# Altium PCB SQUIDCtr_Rev2.PcbDoc (part 1 of 4)
Units mil, origin at the board's own origin, x right, y up, seen from the top; angles counter-clockwise.
Board outline 5863.43 x 2940 mil, 6 copper layers (Top Layer, Internal Plane 1, Mid-Layer 1, InternalPlane 2, Mid-Layer 2, Bottom Layer), stack 62.5 mil thick; 614 components, 343 nets, 1599 pads, 475 vias.
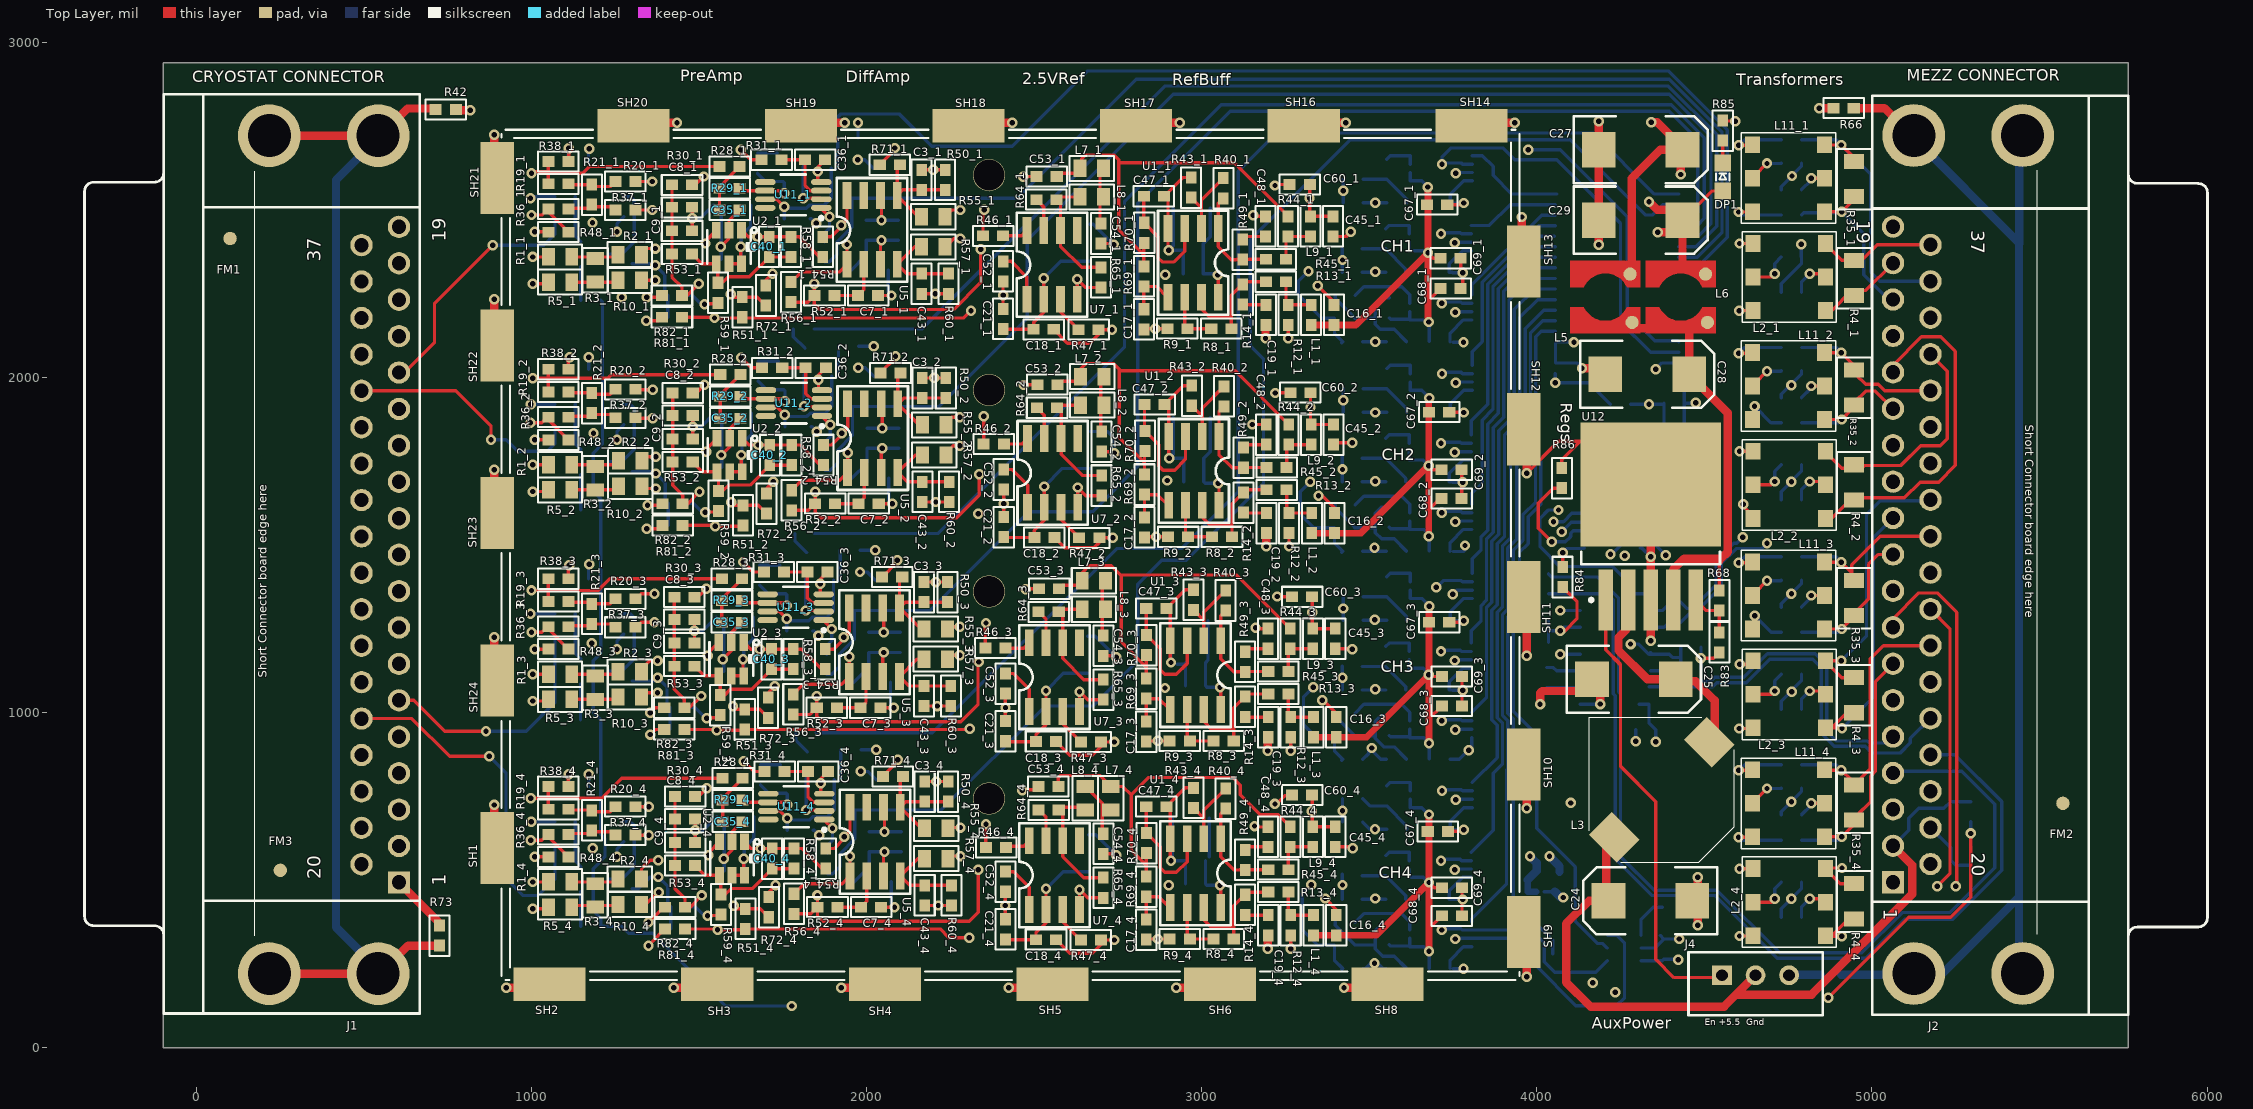
[diagram p0: Top Layer view]
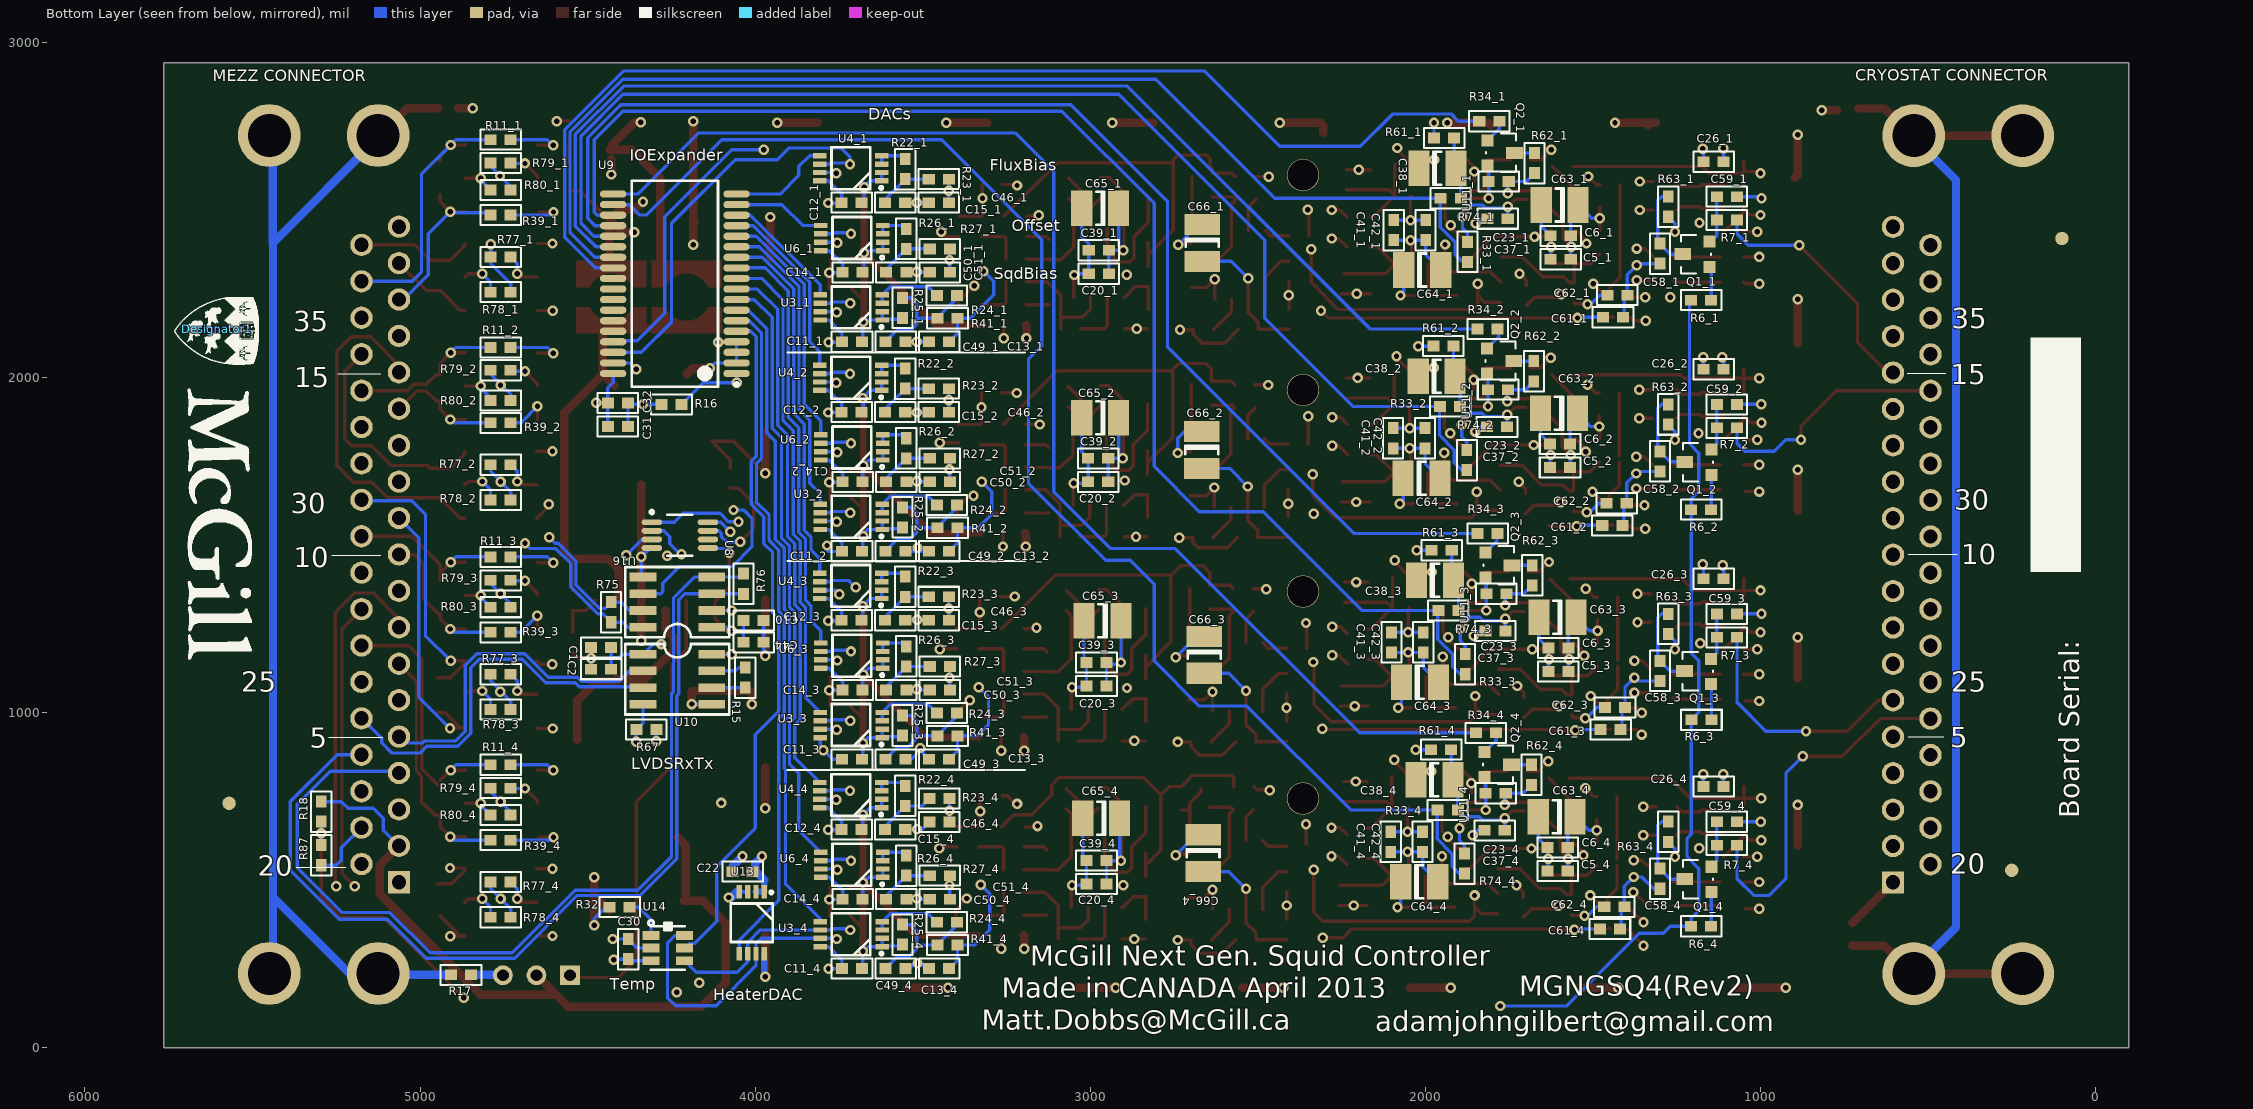
[diagram p1: Bottom Layer view, seen from below]
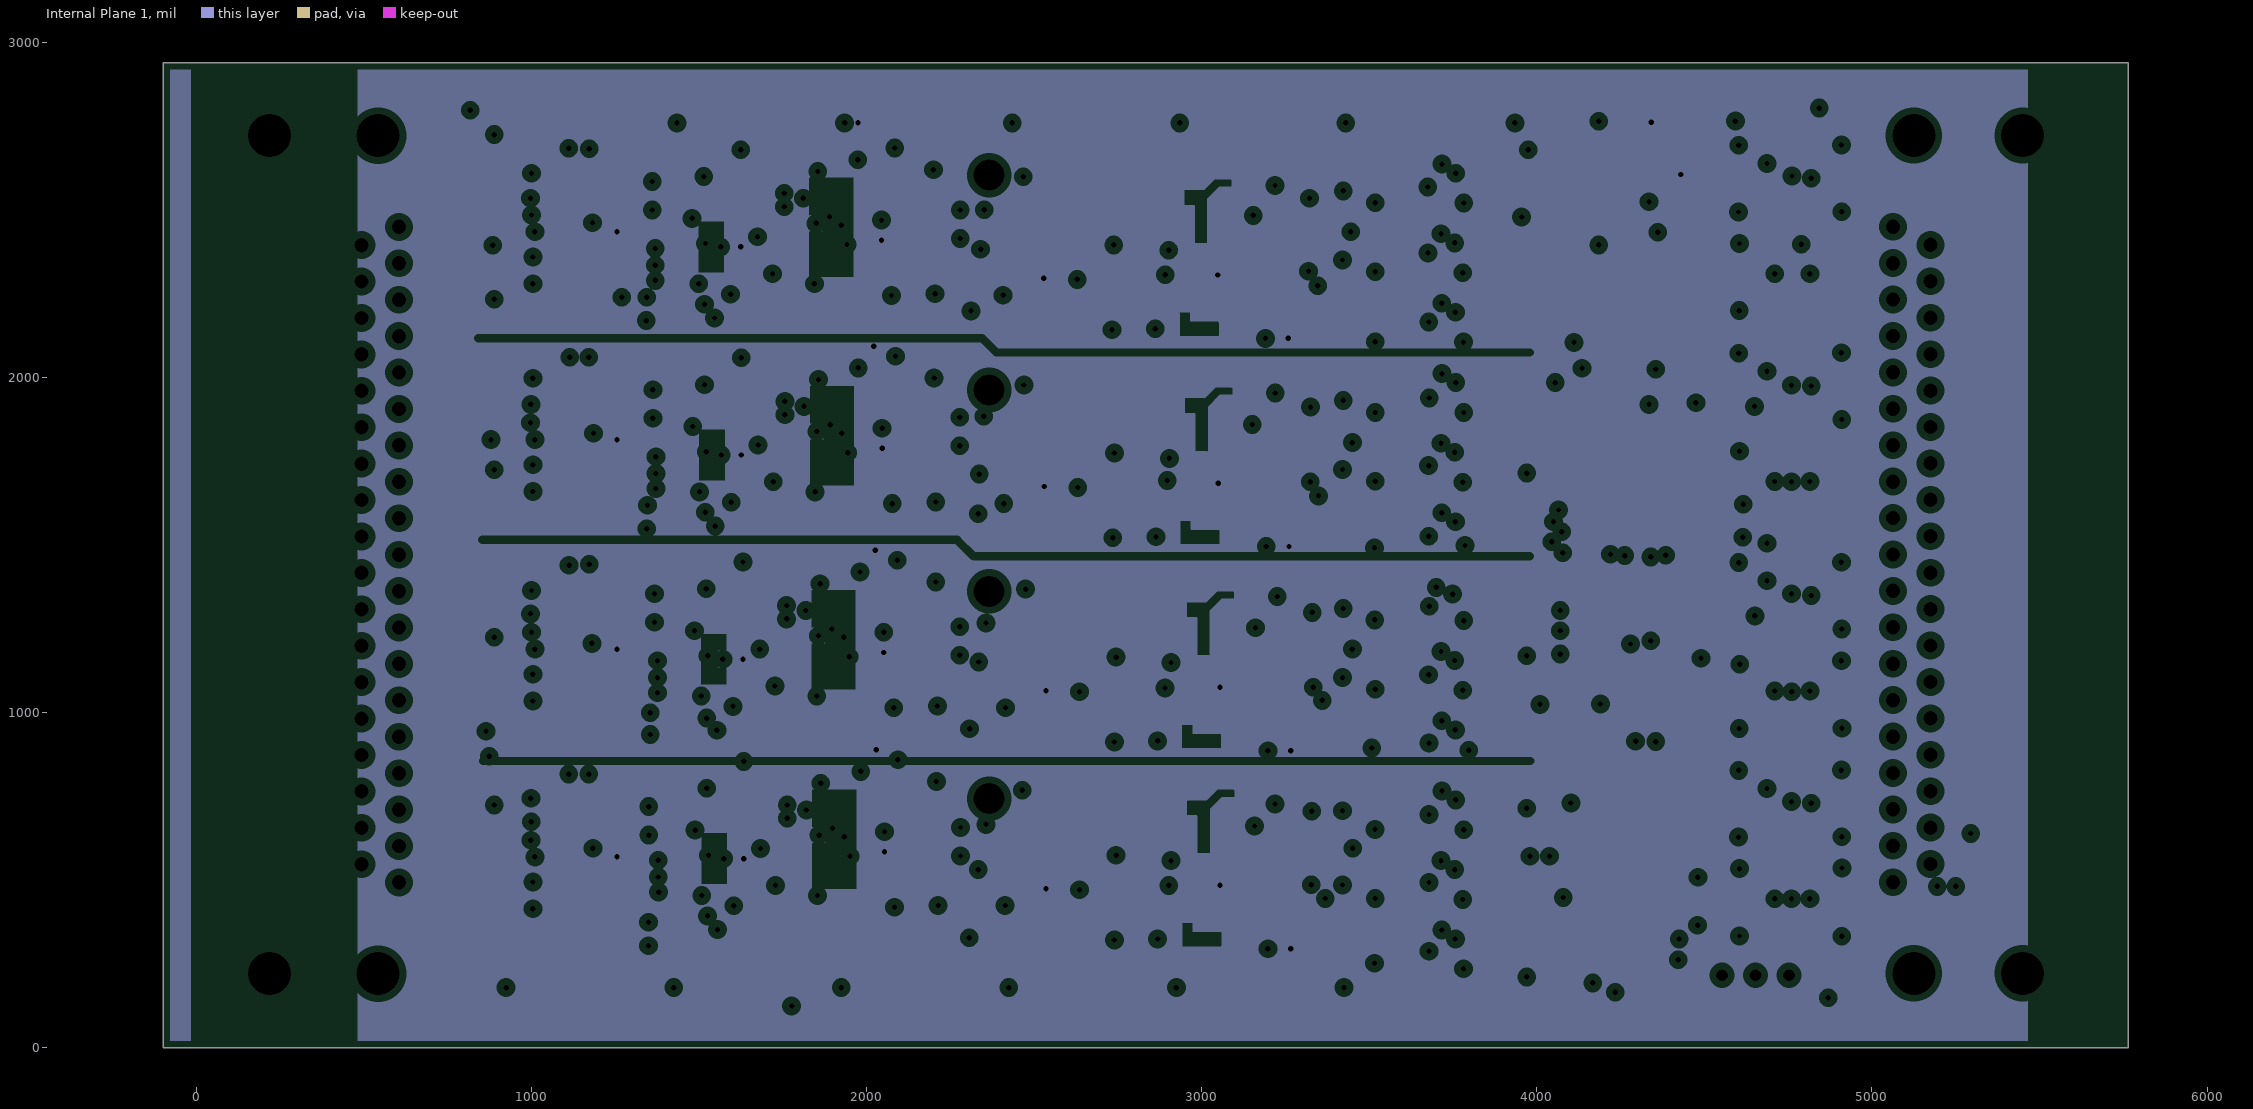
[diagram p2: Internal Plane 1, clearances drawn from the general rule]
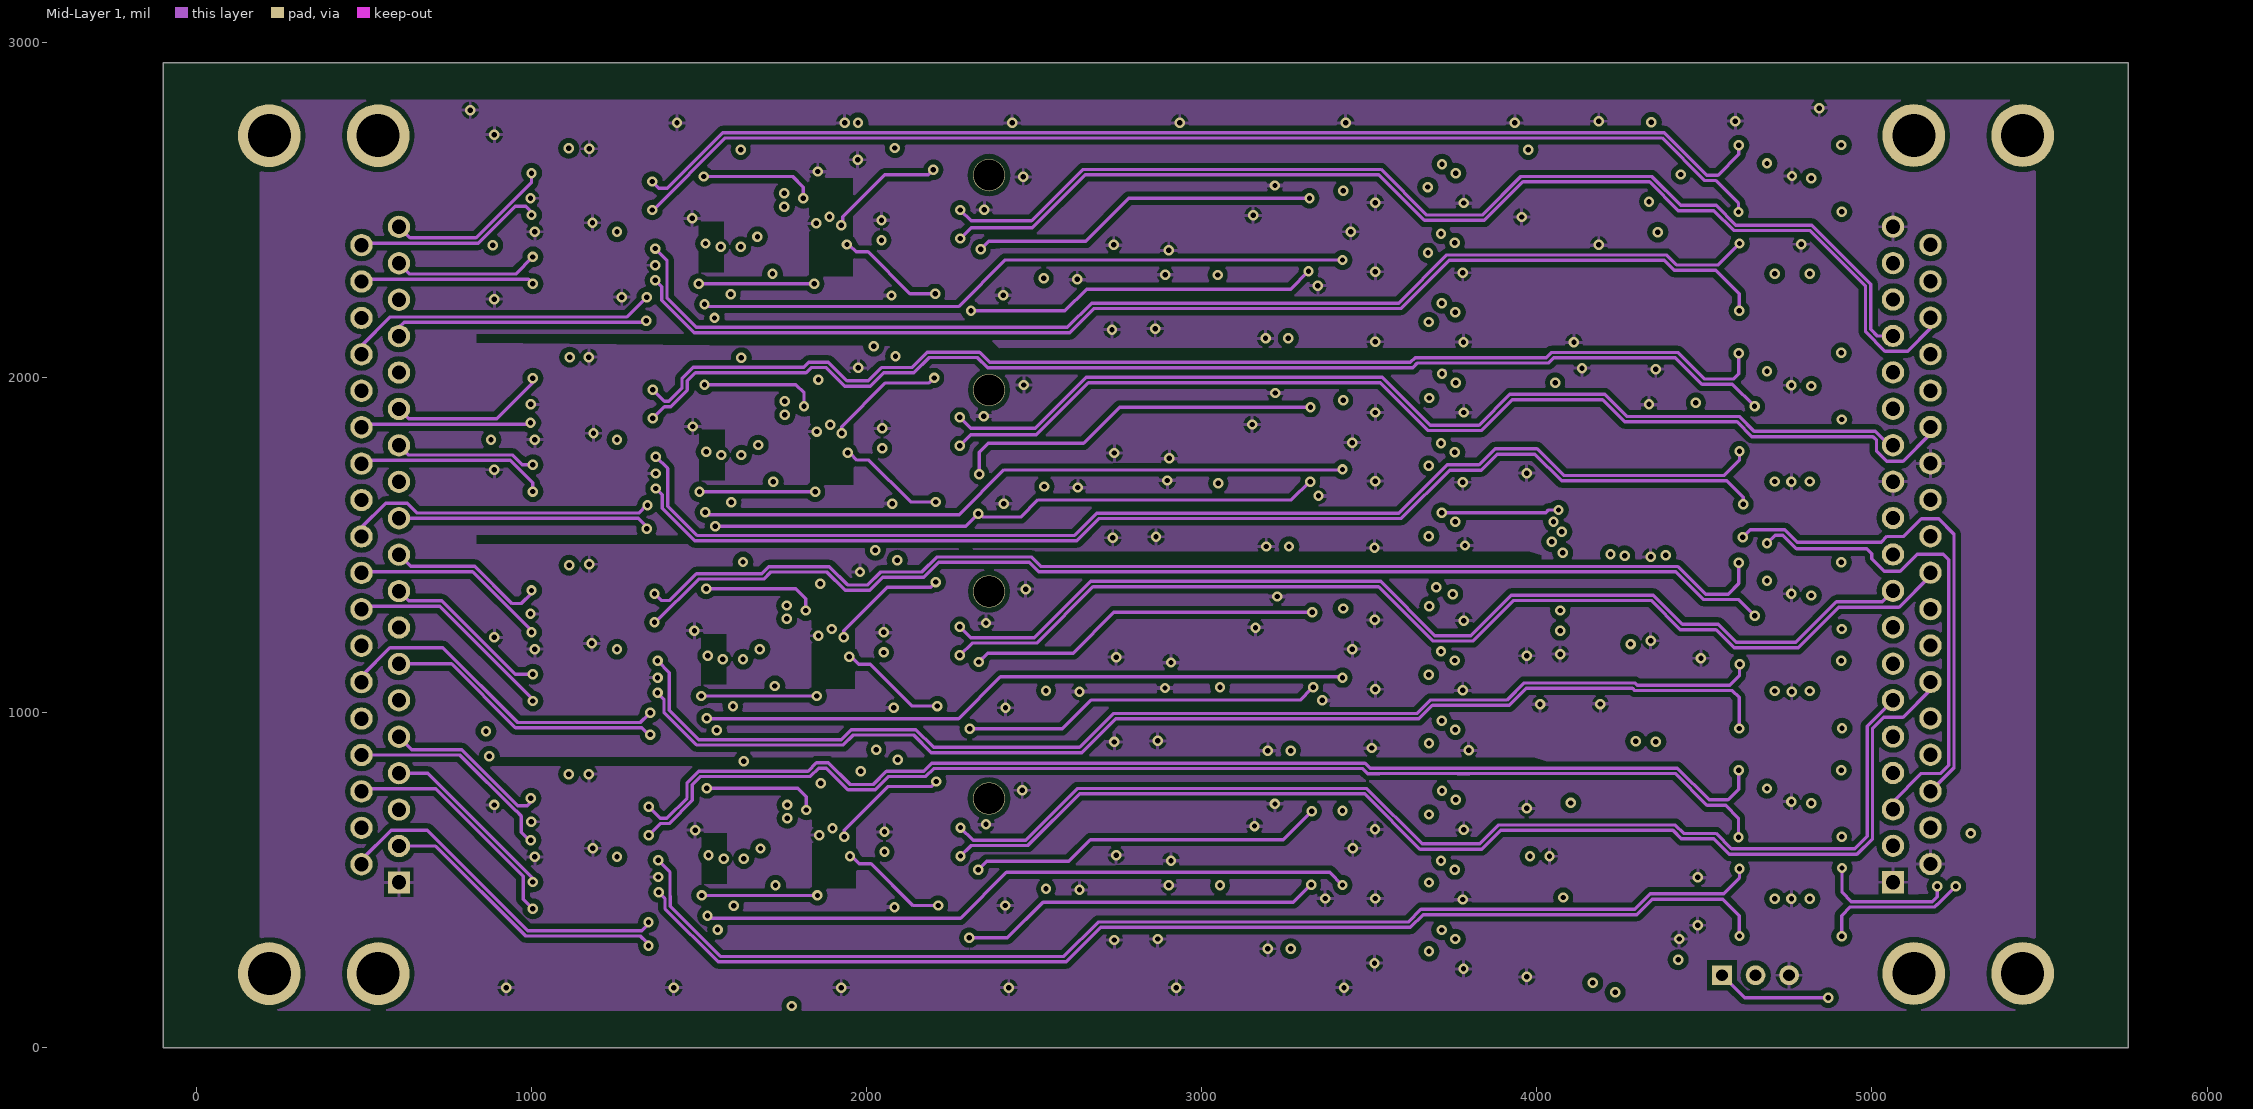
[diagram p3: Mid-Layer 1]
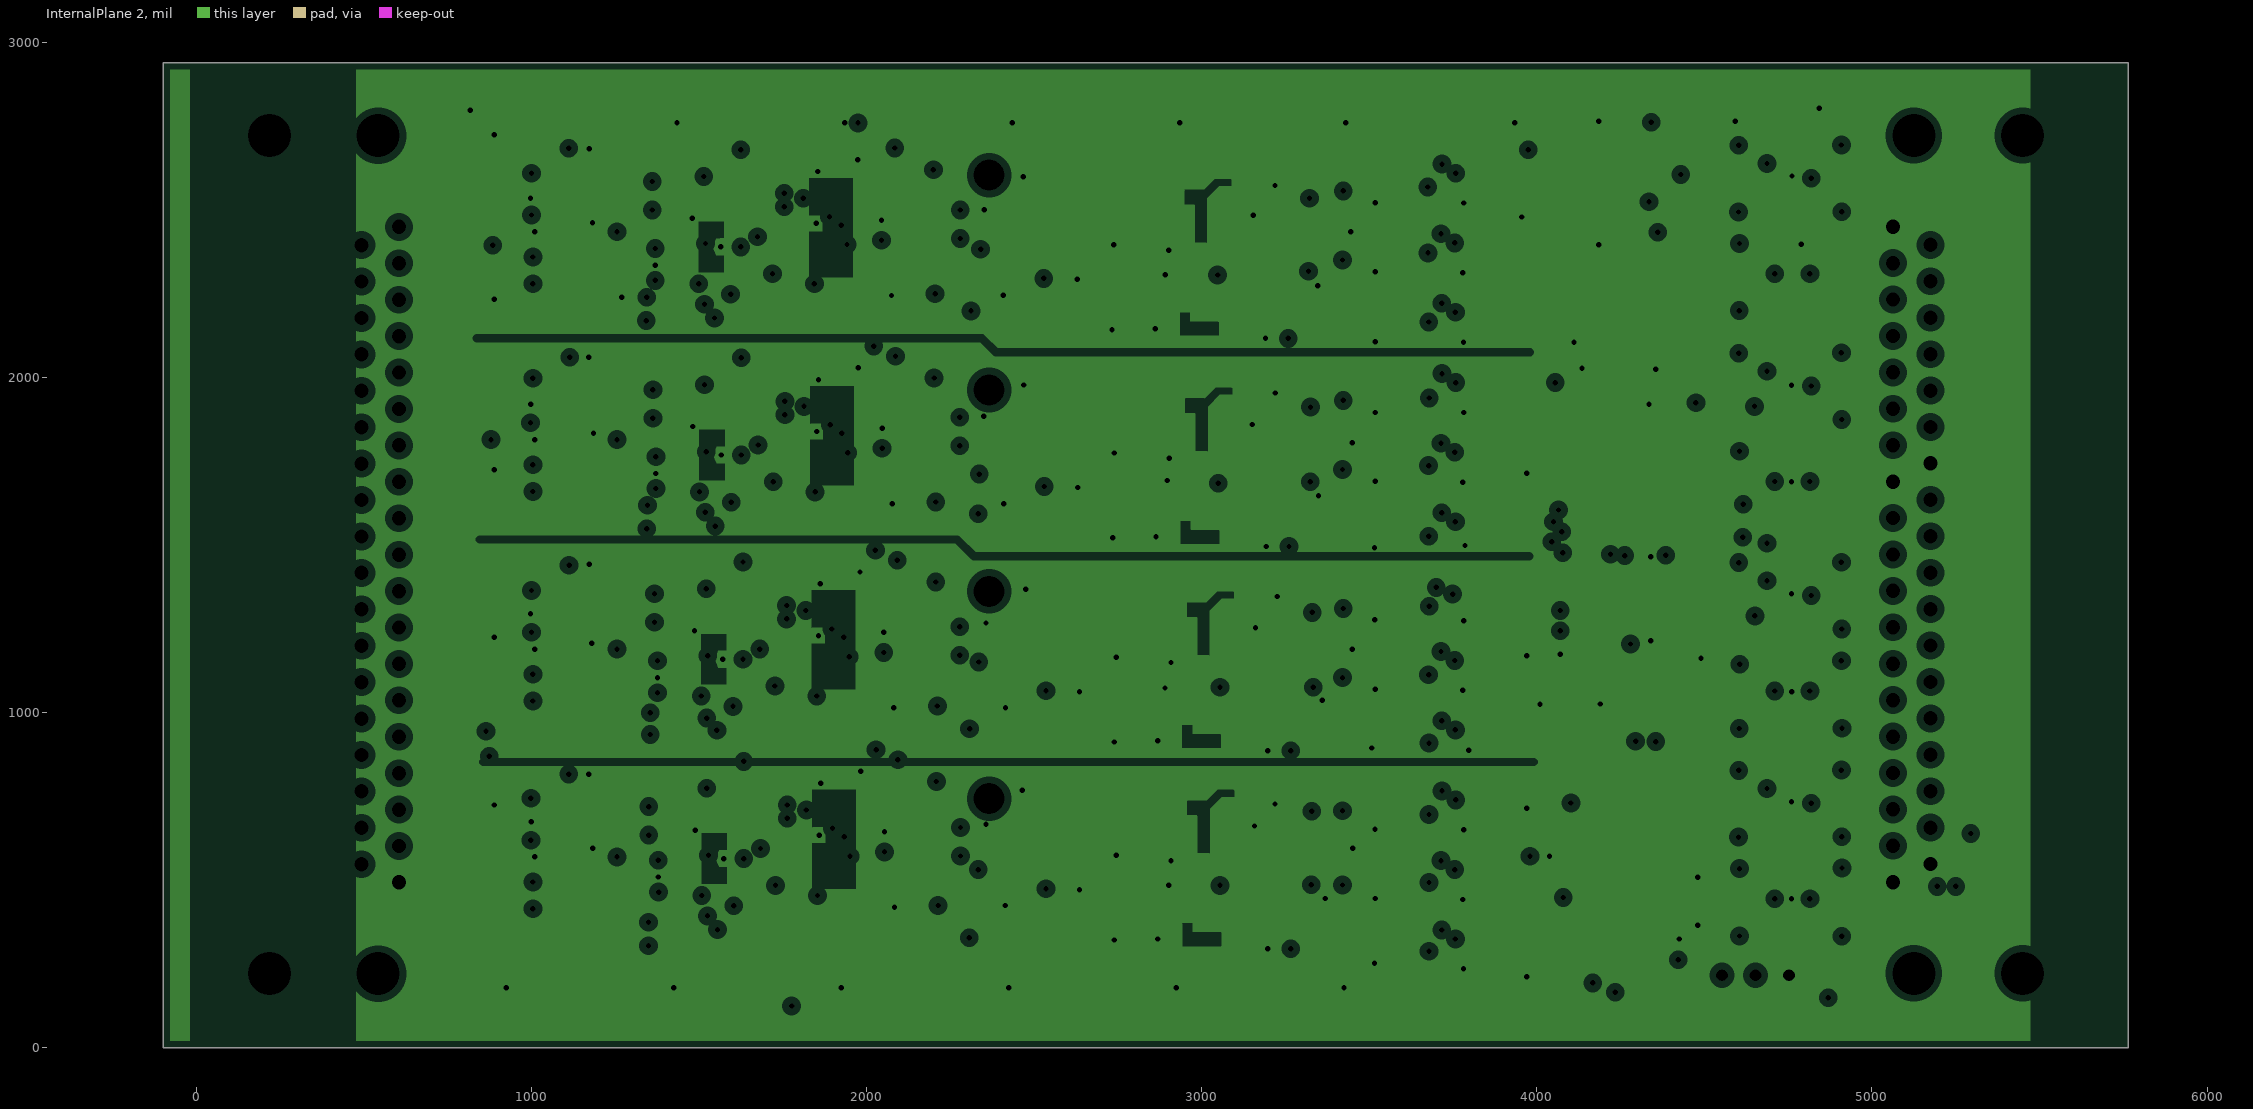
[diagram p4: InternalPlane 2, clearances drawn from the general rule]
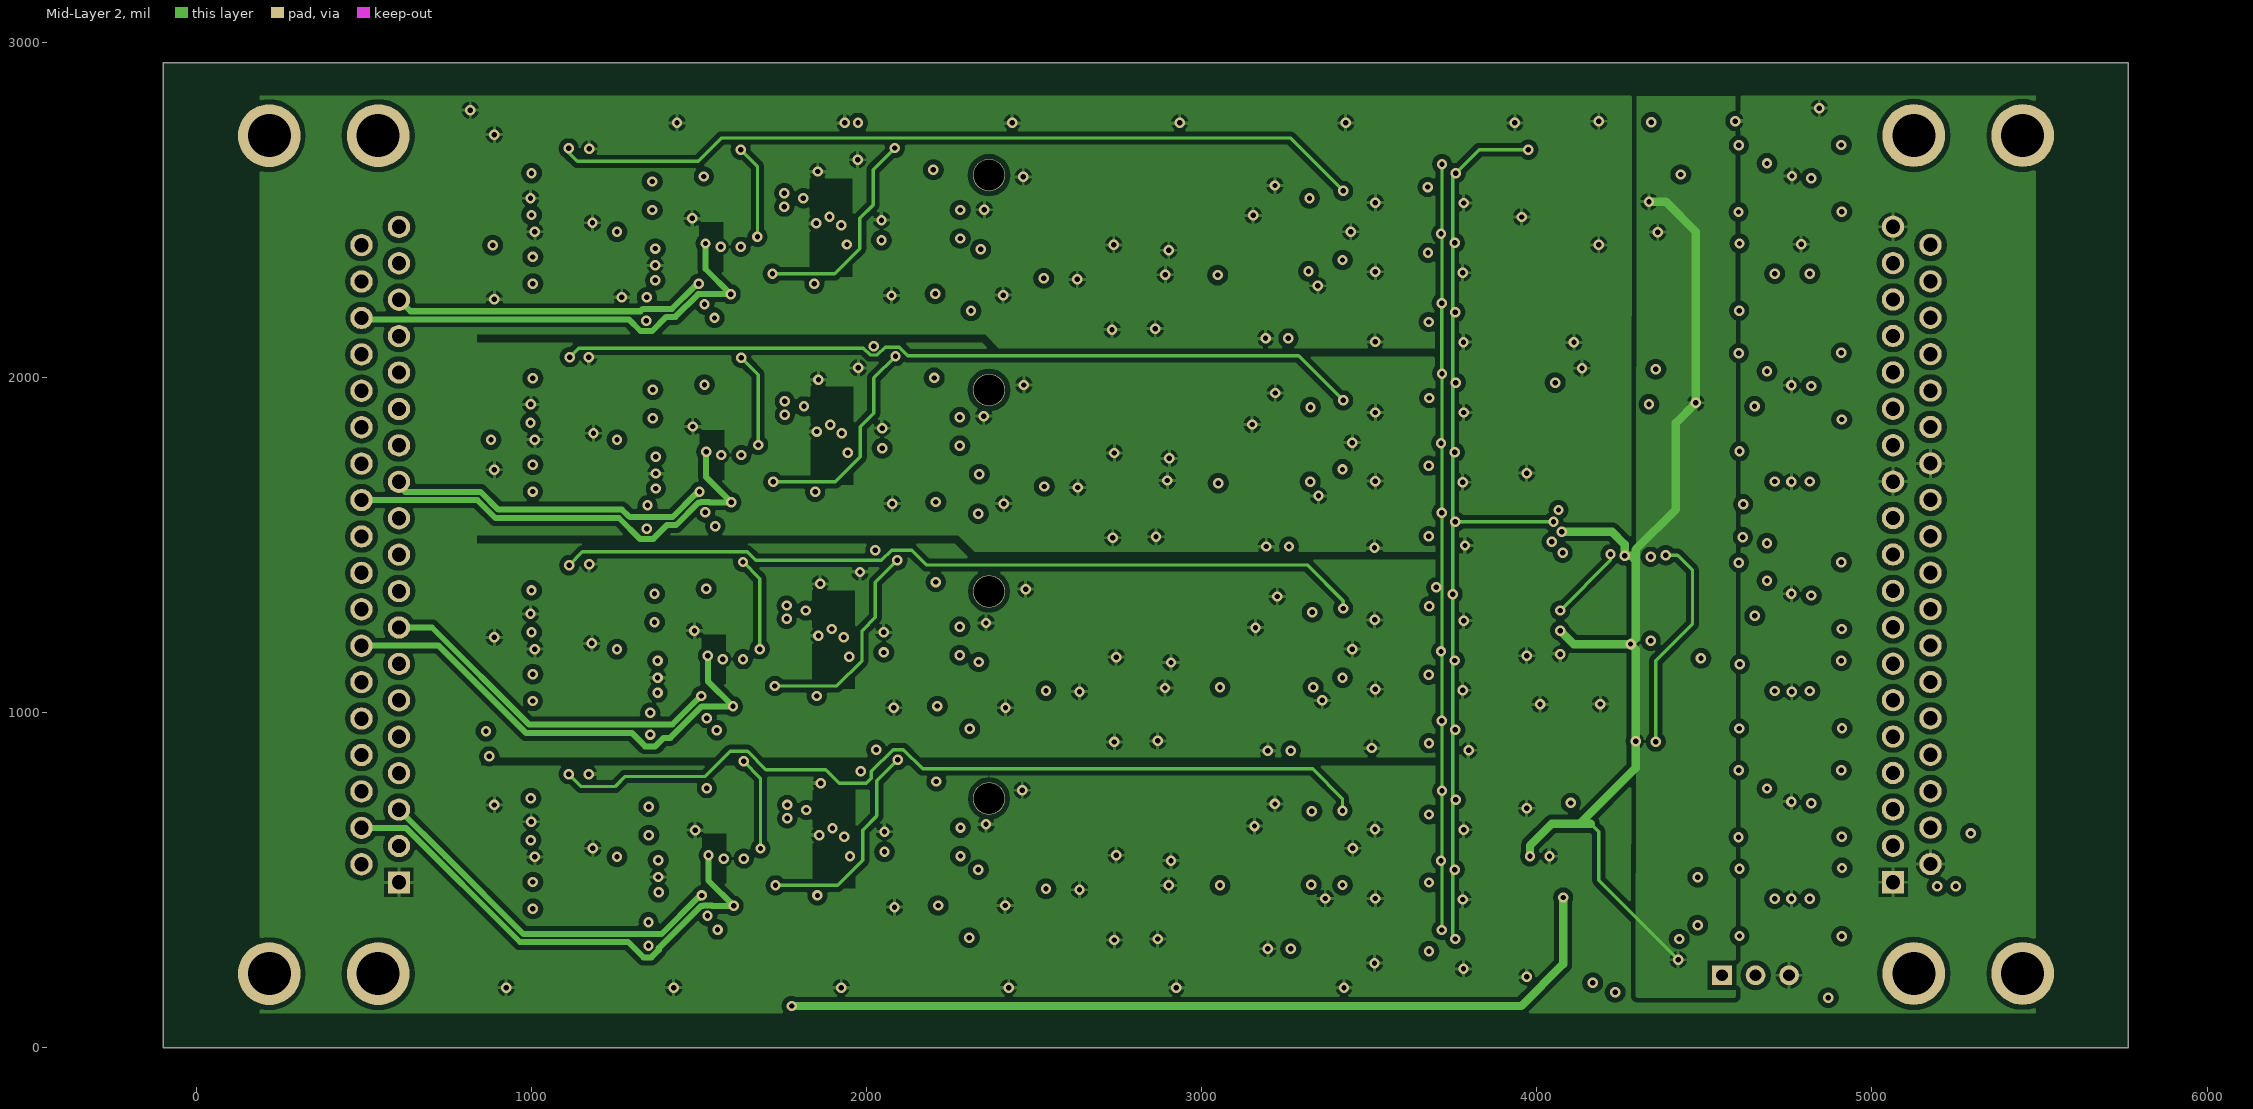
[diagram p5: Mid-Layer 2]

## Layer stack, top to bottom
Top Layer: signal copper 0.7
Dielectric: core 11, FR-4, Dk 4.8
Internal Plane 1: plane copper 1.4, net 5VA
Dielectric: prepreg 13, FR-4, Dk 4.8
Mid-Layer 1: signal copper 1.4
Dielectric: core 7.5, FR-4, Dk 4.8
InternalPlane 2: plane copper 1.4, net GND
Dielectric: prepreg 13, FR-4, Dk 4.8
Mid-Layer 2: signal copper 1.4
Dielectric: core 11, FR-4, Dk 4.8
Bottom Layer: signal copper 0.7

## Board outline
-98.43,0 5765,0 5765,2940 -98.43,2940

## Design rules (kind name [scope] priority, off if disabled: settings)
Clearance ClearanceMid1Poly [(OnLayer('Mid-Layer 1') AND IsRegion)] p1: gap=15
Clearance ClearanceMid2Poly [(OnLayer('Mid-Layer 2') AND IsRegion)] p2: gap=15
Clearance ClearanceMid2 [OnLayer('Mid-Layer 2') vs OnLayer('Mid-Layer 2')] p3: gap=6
Clearance ClearanceMid1 [OnLayer('Mid-Layer 1') vs OnLayer('Mid-Layer 1')] p4: gap=6
Clearance ClearancePoly [(InNamedPolygon('Poly5VD') AND InNet('5VD'))] p5: gap=20
Clearance [All] p6: gap=6
DiffPairsRouting [All] p1: maxlimit=6 minlimit=6 mostfreqgap=6 maxuncoupledlength=500
HoleSize [All] p1: absolutevalues=TRUE maxlimit=150 minlimit=1 maxpercent=80.000 minpercent=20.000
MinimumSolderMaskSliver [All] p1: minsoldermaskwidth=0
PlaneClearance [All] p1: clearance=20
PlaneConnect [All] p1: planeconnectstyle=Relief reliefexpansion=20 reliefentries=4 reliefconductorwidth=10 reliefairgap=10
PolygonConnect [All] p1: connectstyle=Relief reliefconductorwidth=10 reliefentries=4 polygonreliefangle="90 Angle" airgapwidth=10
RoomDefinition REFS4 [InComponentClass('REFS4')] p1 off: confinementstyle=ConfineIn formatcopy=TRUE lockcomponents=FALSE outline 2320,205 5940,205 5940,875 2320,875
RoomDefinition REFS3 [InComponentClass('REFS3')] p2 off: confinementstyle=ConfineIn formatcopy=TRUE lockcomponents=FALSE outline 2320,829 5940,829 5940,1499 2320,1499
RoomDefinition REFS2 [InComponentClass('REFS2')] p3 off: confinementstyle=ConfineIn formatcopy=TRUE lockcomponents=FALSE outline 2320,1450 5940,1450 5940,2120 2320,2120
RoomDefinition REFS1 [InComponentClass('REFS1')] p4 off: confinementstyle=ConfineIn formatcopy=TRUE lockcomponents=FALSE outline 2320,2075 5940,2075 5940,2745 2320,2745
RoomDefinition CH4 [InComponentClass('CH4')] p5 off: confinementstyle=ConfineIn formatcopy=TRUE lockcomponents=FALSE outline 970,280 4955,280 4955,880 970,880
RoomDefinition CH3 [InComponentClass('CH3')] p6 off: confinementstyle=ConfineIn formatcopy=TRUE lockcomponents=FALSE outline 970,900 4955,900 4955,1500 970,1500
RoomDefinition CH2 [InComponentClass('CH2')] p7 off: confinementstyle=ConfineIn formatcopy=TRUE lockcomponents=FALSE outline 970,1525 4955,1525 4955,2125 970,2125
RoomDefinition CH1 [InComponentClass('CH1')] p8 off: confinementstyle=ConfineIn formatcopy=TRUE lockcomponents=FALSE outline 970,2145 4955,2145 4955,2745 970,2745
RoutingVias [All] p1: holewidth=16 width=31 viastyle="Through Hole" minholewidth=8 minwidth=25 maxholewidth=251 maxwidth=268
SilkToSilkClearance [All] p1: silktosilkclearance=0
SilkToSolderMaskClearance SilkscreenOverComponentPads [IsPad] p1: minsilkscreentomaskgap=0 clearancetoexposedcopper=TRUE
SolderMaskExpansion [All] p1: expansion=4
Width Width_DiffPairs [(InDifferentialPairClass('All Differential Pairs'))] p1: maxlimit=18 minlimit=10 preferedwidth=18 toplayer_maxwidth=10 toplayer_prefwidth=10 midlayer1_maxwidth=10 midlayer1_prefwidth=10 midlayer2_minwidth=18 bottomlayer_maxwidth=10 bottomlayer_prefwidth=10 minimp=50.000000 maximp=50.000000 favimp=50.000000
Width [All] p2: maxlimit=50 minlimit=10 preferedwidth=10
21 further rules are at their usual default settings.

## Classes and differential pairs
channel class SQUID_Channel_DACS: Designator1 Designator2 Designator3 Designator4
component class CH4: C3_4 C5_4 C6_4 C7_4 C8_4 C9_4 C23_4 C35_4 C36_4 C37_4 C38_4 C40_4 C41_4 C42_4 C43_4 C58_4 C59_4 C63_4 C64_4 L2_4 L11_4 Q1_4 Q2_4 R1_4 R2_4 R3_4 R4_4 R5_4 R6_4 R7_4 R10_4 R11_4 R19_4 R20_4 R21_4 R28_4 R29_4 R30_4 R31_4 R33_4 R34_4 R35_4 R36_4 R37_4 R38_4 R39_4 R48_4 R50_4 R51_4 R52_4 R53_4 R54_4 R55_4 R56_4 R57_4 R58_4 R59_4 R60_4 R61_4 R62_4 R63_4 R71_4 R72_4 R74_4 R77_4 R78_4 R79_4 R80_4 R81_4 R82_4 U2_4 U5_4 U11_4
component class CH3: C3_3 C5_3 C6_3 C7_3 C8_3 C9_3 C23_3 C35_3 C36_3 C37_3 C38_3 C40_3 C41_3 C42_3 C43_3 C58_3 C59_3 C63_3 C64_3 L2_3 L11_3 Q1_3 Q2_3 R1_3 R2_3 R3_3 R4_3 R5_3 R6_3 R7_3 R10_3 R11_3 R19_3 R20_3 R21_3 R28_3 R29_3 R30_3 R31_3 R33_3 R34_3 R35_3 R36_3 R37_3 R38_3 R39_3 R48_3 R50_3 R51_3 R52_3 R53_3 R54_3 R55_3 R56_3 R57_3 R58_3 R59_3 R60_3 R61_3 R62_3 R63_3 R71_3 R72_3 R74_3 R77_3 R78_3 R79_3 R80_3 R81_3 R82_3 U2_3 U5_3 U11_3
component class CH2: C3_2 C5_2 C6_2 C7_2 C8_2 C9_2 C23_2 C35_2 C36_2 C37_2 C38_2 C40_2 C41_2 C42_2 C43_2 C58_2 C59_2 C63_2 C64_2 L2_2 L11_2 Q1_2 Q2_2 R1_2 R2_2 R3_2 R4_2 R5_2 R6_2 R7_2 R10_2 R11_2 R19_2 R20_2 R21_2 R28_2 R29_2 R30_2 R31_2 R33_2 R34_2 R35_2 R36_2 R37_2 R38_2 R39_2 R48_2 R50_2 R51_2 R52_2 R53_2 R54_2 R55_2 R56_2 R57_2 R58_2 R59_2 R60_2 R61_2 R62_2 R63_2 R71_2 R72_2 R74_2 R77_2 R78_2 R79_2 R80_2 R81_2 R82_2 U2_2 U5_2 U11_2
component class CH1: C3_1 C5_1 C6_1 C7_1 C8_1 C9_1 C23_1 C35_1 C36_1 C37_1 C38_1 C40_1 C41_1 C42_1 C43_1 C58_1 C59_1 C63_1 C64_1 L2_1 L11_1 Q1_1 Q2_1 R1_1 R2_1 R3_1 R4_1 R5_1 R6_1 R7_1 R10_1 R11_1 R19_1 R20_1 R21_1 R28_1 R29_1 R30_1 R31_1 R33_1 R34_1 R35_1 R36_1 R37_1 R38_1 R39_1 R48_1 R50_1 R51_1 R52_1 R53_1 R54_1 R55_1 R56_1 R57_1 R58_1 R59_1 R60_1 R61_1 R62_1 R63_1 R71_1 R72_1 R74_1 R77_1 R78_1 R79_1 R80_1 R81_1 R82_1 U2_1 U5_1 U11_1
component class REFS1: C11_1 C12_1 C13_1 C14_1 C15_1 C16_1 C17_1 C18_1 C19_1 C20_1 C21_1 C26_1 C39_1 C45_1 C46_1 C47_1 C48_1 C49_1 C50_1 C51_1 C52_1 C53_1 C54_1 C60_1 C61_1 C62_1 C65_1 C66_1 C67_1 C68_1 C69_1 CH1_U5 L1_1 L7_1 L8_1 L9_1 R8_1 R9_1 R12_1 R13_1 R14_1 R22_1 R23_1 R24_1 R25_1 R26_1 R27_1 R40_1 R41_1 R43_1 R44_1 R45_1 R46_1 R47_1 R49_1 R64_1 R65_1 R69_1 R70_1 U1_1 U3_1 U4_1 U6_1 U7_1
channel class SQUID_Channel: CH1 CH2 CH3 CH4
component class REFS2: C11_2 C12_2 C13_2 C14_2 C15_2 C16_2 C17_2 C18_2 C19_2 C20_2 C21_2 C26_2 C39_2 C45_2 C46_2 C47_2 C48_2 C49_2 C50_2 C51_2 C52_2 C53_2 C54_2 C60_2 C61_2 C62_2 C65_2 C66_2 C67_2 C68_2 C69_2 L1_2 L7_2 L8_2 L9_2 R8_2 R9_2 R12_2 R13_2 R14_2 R22_2 R23_2 R24_2 R25_2 R26_2 R27_2 R40_2 R41_2 R43_2 R44_2 R45_2 R46_2 R47_2 R49_2 R64_2 R65_2 R69_2 R70_2 U1_2 U3_2 U4_2 U6_2 U7_2
component class REFS3: C11_3 C12_3 C13_3 C14_3 C15_3 C16_3 C17_3 C18_3 C19_3 C20_3 C21_3 C26_3 C39_3 C45_3 C46_3 C47_3 C48_3 C49_3 C50_3 C51_3 C52_3 C53_3 C54_3 C60_3 C61_3 C62_3 C65_3 C66_3 C67_3 C68_3 C69_3 L1_3 L7_3 L8_3 L9_3 R8_3 R9_3 R12_3 R13_3 R14_3 R22_3 R23_3 R24_3 R25_3 R26_3 R27_3 R40_3 R41_3 R43_3 R44_3 R45_3 R46_3 R47_3 R49_3 R64_3 R65_3 R69_3 R70_3 U1_3 U3_3 U4_3 U6_3 U7_3
component class REFS4: C11_4 C12_4 C13_4 C14_4 C15_4 C16_4 C17_4 C18_4 C19_4 C20_4 C21_4 C26_4 C39_4 C45_4 C46_4 C47_4 C48_4 C49_4 C50_4 C51_4 C52_4 C53_4 C54_4 C60_4 C61_4 C62_4 C65_4 C66_4 C67_4 C68_4 C69_4 L1_4 L7_4 L8_4 L9_4 R8_4 R9_4 R12_4 R13_4 R14_4 R22_4 R23_4 R24_4 R25_4 R26_4 R27_4 R40_4 R41_4 R43_4 R44_4 R45_4 R46_4 R47_4 R49_4 R64_4 R65_4 R69_4 R70_4 U1_4 U3_4 U4_4 U6_4 U7_4
component class Control: C1 C2 C10 C31 C32 C44 R15 R16 R67 R75 R76 R84 R86 U8 U9 U10 U16
component class Power: C24 C25 C27 C28 C29 DP1 FM1 FM2 FM3 J4 L3 L5 L6 R18 R68 R83 R85 SH1 SH2 SH3 SH4 SH5 SH6 SH8 SH9 SH10 SH11 SH12 SH13 SH14 SH16 SH17 SH18 SH19 SH20 SH21 SH22 SH23 SH24 U12
component class SQUIDCtrl_Rev2: C22 C30 J1 J2 R17 R32 R42 R66 R73 R87 U13 U14
differential pair CH4_MEZZ.NULLER: +CH4_MEZZ.NULLER_P -CH4_MEZZ.NULLER_N
differential pair CH4_MEZZ.BIAS: +CH4_MEZZ.BIAS_P -CH4_MEZZ.BIAS_N
differential pair CH3_MEZZ.NULLER: +CH3_MEZZ.NULLER_P -CH3_MEZZ.NULLER_N
differential pair CH3_MEZZ.BIAS: +CH3_MEZZ.BIAS_P -CH3_MEZZ.BIAS_N
differential pair CH2_MEZZ.NULLER: +CH2_MEZZ.NULLER_P -CH2_MEZZ.NULLER_N
differential pair CH2_MEZZ.BIAS: +CH2_MEZZ.BIAS_P -CH2_MEZZ.BIAS_N
differential pair CH1_MEZZ.NULLER: +CH1_MEZZ.NULLER_P -CH1_MEZZ.NULLER_N
differential pair CH1_MEZZ.BIAS: +CH1_MEZZ.BIAS_P -CH1_MEZZ.BIAS_N
differential pair CH4_MEZZ.SQUID_OUT: +CH4_MEZZ.SQUID_OUT_P -CH4_MEZZ.SQUID_OUT_N
differential pair CH3_MEZZ.SQUID_OUT: +CH3_MEZZ.SQUID_OUT_P -CH3_MEZZ.SQUID_OUT_N
differential pair CH2_MEZZ.SQUID_OUT: +CH2_MEZZ.SQUID_OUT_P -CH2_MEZZ.SQUID_OUT_N
differential pair CH1_MEZZ.SQUID_OUT: +CH1_MEZZ.SQUID_OUT_P -CH1_MEZZ.SQUID_OUT_N
differential pair CARRIER_1: +CARRIER_1_P -CARRIER_1_N
differential pair CARRIER_2: +CARRIER_2_P -CARRIER_2_N
differential pair CARRIER_3: +CARRIER_3_P -CARRIER_3_N
differential pair CARRIER_4: +CARRIER_4_P -CARRIER_4_N
differential pair NULLER_1: +NULLER_1_P -NULLER_1_N
differential pair NULLER_2: +NULLER_2_P -NULLER_2_N
differential pair NULLER_3: +NULLER_3_P -NULLER_3_N
differential pair NULLER_4: +NULLER_4_P -NULLER_4_N
differential pair CH1_CRYO.BOLO: +CH1_CRYO.BOLO_P -CH1_CRYO.BOLO_N
differential pair CH1_CRYO.SQUID_COIL: +CH1_CRYO.SQUID_COIL_P -CH1_CRYO.SQUID_COIL_N
differential pair CH2_CRYO.BOLO: +CH2_CRYO.BOLO_P -CH2_CRYO.BOLO_N
differential pair CH2_CRYO.SQUID_COIL: +CH2_CRYO.SQUID_COIL_P -CH2_CRYO.SQUID_COIL_N
differential pair CH3_CRYO.BOLO: +CH3_CRYO.BOLO_P -CH3_CRYO.BOLO_N
differential pair CH3_CRYO.SQUID_COIL: +CH3_CRYO.SQUID_COIL_P -CH3_CRYO.SQUID_COIL_N
differential pair CH4_CRYO.BOLO: +CH4_CRYO.BOLO_P -CH4_CRYO.BOLO_N
differential pair CH4_CRYO.SQUID_COIL: +CH4_CRYO.SQUID_COIL_P -CH4_CRYO.SQUID_COIL_N
differential pair CH1_CRYO.SQUID_SENSE: +CH1_CRYO.SQUID_SENSE_P -CH1_CRYO.SQUID_SENSE_N
differential pair CH2_CRYO.SQUID_SENSE: +CH2_CRYO.SQUID_SENSE_P -CH2_CRYO.SQUID_SENSE_N
differential pair CH3_CRYO.SQUID_SENSE: +CH3_CRYO.SQUID_SENSE_P -CH3_CRYO.SQUID_SENSE_N
differential pair CH4_CRYO.SQUID_SENSE: +CH4_CRYO.SQUID_SENSE_P -CH4_CRYO.SQUID_SENSE_N
differential pair CH1_CRYO.SQUID_BIAS: +CH1_CRYO.SQUID_BIAS_P -CH1_CRYO.SQUID_BIAS_N
differential pair CH2_CRYO.SQUID_BIAS: +CH2_CRYO.SQUID_BIAS_P -CH2_CRYO.SQUID_BIAS_N
differential pair CH3_CRYO.SQUID_BIAS: +CH3_CRYO.SQUID_BIAS_P -CH3_CRYO.SQUID_BIAS_N
differential pair CH4_CRYO.SQUID_BIAS: +CH4_CRYO.SQUID_BIAS_P -CH4_CRYO.SQUID_BIAS_N
differential pair SCL: +SCL_P -SCL_N
differential pair SDA_MISO: +SDA_MISO_P -SDA_MISO_N
differential pair SDA_MOSI: +SDA_MOSI_P -SDA_MOSI_N

## Components (designator, comment, footprint, x,y, rotation, side; value= is the part's Value field where it differs from the comment)
C1 "0.1uF" 0603 4490,1195 r180 bottom
C2 "1nF" 0603 4490,1130 r180 bottom
C3_1 "5pF" 0603 2165,2560 r90 top (schematic designator C3)
C3_2 "5pF" 0603 2167,1939 r90 top (schematic designator C3)
C3_3 "5pF" 0603 2172,1330 r90 top (schematic designator C3)
C3_4 "5pF" 0603 2174,735 r90 top (schematic designator C3)
C5_1 "0.1uF" 0603 1567,2353 r0 bottom (schematic designator C5)
C5_2 "0.1uF" 0603 1569,1732 r0 bottom (schematic designator C5)
C5_3 "0.1uF" 0603 1574,1123 r0 bottom (schematic designator C5)
C5_4 "0.1uF" 0603 1576,528 r0 bottom (schematic designator C5)
C6_1 "1nF" 0603 1567,2423 r0 bottom (schematic designator C6)
C6_2 "1nF" 0603 1569,1802 r0 bottom (schematic designator C6)
C6_3 "1nF" 0603 1574,1193 r0 bottom (schematic designator C6)
C6_4 "1nF" 0603 1576,598 r0 bottom (schematic designator C6)
C7_1 "1nF" 0603 2035,2245 r180 top (schematic designator C7)
C7_2 "1nF" 0603 2037,1624 r180 top (schematic designator C7)
C7_3 "1nF" 0603 2042,1015 r180 top (schematic designator C7)
C7_4 "1nF" 0603 2044,420 r180 top (schematic designator C7)
C8_1 "0.1uF" 0603 1480,2508 r180 top (schematic designator C8)
C8_2 "0.1uF" 0603 1482,1887 r180 top (schematic designator C8)
C8_3 "0.1uF" 0603 1487,1278 r180 top (schematic designator C8)
C8_4 "0.1uF" 0603 1489,683 r180 top (schematic designator C8)
C9_1 "1nF" 0603 1480,2438 r180 top (schematic designator C9)
C9_2 "1nF" 0603 1482,1817 r180 top (schematic designator C9)
C9_3 "1nF" 0603 1487,1208 r180 top (schematic designator C9)
C9_4 "1nF" 0603 1489,613 r180 top (schematic designator C9)
C10 "0.1uF" 0603 3975,1275 r0 bottom
C11_1 "0.1uF" 0603 3681.5,2107 r0 bottom (schematic designator C11)
C11_2 "0.1uF" 0603 3681.5,1482 r0 bottom (schematic designator C11)
C11_3 "0.1uF" 0603 3681.5,861 r0 bottom (schematic designator C11)
C11_4 "0.1uF" 0603 3681.5,237 r0 bottom (schematic designator C11)
C12_1 "0.1uF" 0603 3682.5,2522 r0 bottom (schematic designator C12)
C12_2 "0.1uF" 0603 3682.5,1897 r0 bottom (schematic designator C12)
C12_3 "0.1uF" 0603 3682.5,1276 r0 bottom (schematic designator C12)
C12_4 "0.1uF" 0603 3682.5,652 r0 bottom (schematic designator C12)
C13_1 "0.1uF" 0603 3421.5,2107 r0 bottom (schematic designator C13)
C13_2 "0.1uF" 0603 3421.5,1482 r0 bottom (schematic designator C13)
C13_3 "0.1uF" 0603 3421.5,861 r0 bottom (schematic designator C13)
C13_4 "0.1uF" 0603 3421.5,237 r0 bottom (schematic designator C13)
C14_1 "0.1uF" 0603 3739.5,2314 r180 bottom (schematic designator C14)
C14_2 "0.1uF" 0603 3739.5,1689 r180 bottom (schematic designator C14)
C14_3 "0.1uF" 0603 3739.5,1068 r180 bottom (schematic designator C14)
C14_4 "0.1uF" 0603 3739.5,444 r180 bottom (schematic designator C14)
C15_1 "0.1uF" 0603 3612.5,2522 r180 bottom (schematic designator C15)
C15_2 "0.1uF" 0603 3612.5,1897 r180 bottom (schematic designator C15)
C15_3 "0.1uF" 0603 3612.5,1276 r180 bottom (schematic designator C15)
C15_4 "0.1uF" 0603 3612.5,652 r180 bottom (schematic designator C15)
C16_1 "0.1uF" 0603 3395,2217 r270 top (schematic designator C16)
C16_2 "0.1uF" 0603 3397,1596 r270 top (schematic designator C16)
C16_3 "0.1uF" 0603 3402,987 r270 top (schematic designator C16)
C16_4 "0.1uF" 0603 3402,396 r270 top (schematic designator C16)
C17_1 "1nF" 0603 2828,2144 r90 top (schematic designator C17)
C17_2 "1nF" 0603 2830,1523 r90 top (schematic designator C17)
C17_3 "1nF" 0603 2835,914 r90 top (schematic designator C17)
C17_4 "1nF" 0603 2835,323 r90 top (schematic designator C17)
C18_1 "0.1uF" 0603 2559,2144 r180 top (schematic designator C18)
C18_2 "0.1uF" 0603 2561,1523 r180 top (schematic designator C18)
C18_3 "0.1uF" 0603 2566,914 r180 top (schematic designator C18)
C18_4 "0.1uF" 0603 2566,323 r180 top (schematic designator C18)
C19_1 "10uF" 0603 3192,2157 r90 top (schematic designator C19)
C19_2 "10uF" 0603 3194,1536 r90 top (schematic designator C19)
C19_3 "10uF" 0603 3199,927 r90 top (schematic designator C19)
C19_4 "10uF" 0603 3199,336 r90 top (schematic designator C19)
C20_1 "1nF" 0603 2945,2310 r0 bottom (schematic designator C20)
C20_2 "1nF" 0603 2947,1689 r0 bottom (schematic designator C20)
C20_3 "1nF" 0603 2952,1080 r0 bottom (schematic designator C20)
C20_4 "1nF" 0603 2952,489 r0 bottom (schematic designator C20)
C21_1 "1nF" 0603 2408,2205 r270 top (schematic designator C21)
C21_2 "1nF" 0603 2410,1584 r270 top (schematic designator C21)
C21_3 "1nF" 0603 2415,975 r270 top (schematic designator C21)
C21_4 "1nF" 0603 2415,384 r270 top (schematic designator C21)
C22 "0.1uF" 0603 4068,526 r180 bottom
C23_1 "10nF" 0603 1812,2585 r180 bottom (schematic designator C23)
C23_2 "10nF" 0603 1814,1964 r180 bottom (schematic designator C23)
C23_3 "10nF" 0603 1819,1355 r180 bottom (schematic designator C23)
C23_4 "10nF" 0603 1821,760 r180 bottom (schematic designator C23)
C24 "33uF" TCASE-D 4214,439 r0 top
C25 "33uF" TCASE-D 4415,1100 r180 top
C26_1 "0.1uF" 0603 1111,2644 r0 bottom (schematic designator C26)
C26_2 "0.1uF" 0603 1111,2025 r0 bottom (schematic designator C26)
C26_3 "0.1uF" 0603 1111,1400 r0 bottom (schematic designator C26)
C26_4 "0.1uF" 0603 1111,780 r0 bottom (schematic designator C26)
C27 "33uF" TCASE-D 4435,2680 r180 top
C28 "33uF" TCASE-D 4455,2010 r180 top
C29 "33uF" TCASE-D 4435,2470 r180 top
C30 "0.1uF" 0603 4379,325 r270 bottom
C31 "0.1uF" 0603 4380,1854 r0 bottom
C32 "1nF" 0603 4380,1924 r0 bottom
C35_1 "1nF" 0603 1562,2500 r0 top (schematic designator C35)
C35_2 "1nF" 0603 1564,1879 r0 top (schematic designator C35)
C35_3 "1nF" 0603 1569,1270 r0 top (schematic designator C35)
C35_4 "1nF" 0603 1571,675 r0 top (schematic designator C35)
C36_1 "1nF" 0603 1877,2650 r180 top (schematic designator C36)
C36_2 "1nF" 0603 1879,2029 r180 top (schematic designator C36)
C36_3 "1nF" 0603 1884,1420 r180 top (schematic designator C36)
C36_4 "1nF" 0603 1886,825 r180 top (schematic designator C36)
C37_1 "0.1uF" 0603 1815,2474.13 r180 bottom (schematic designator C37)
C37_2 "0.1uF" 0603 1817,1853.13 r180 bottom (schematic designator C37)
C37_3 "0.1uF" 0603 1822,1244.13 r180 bottom (schematic designator C37)
C37_4 "0.1uF" 0603 1824,649.13 r180 bottom (schematic designator C37)
C38_1 "10uF, 1210" CC3225-1210 1965,2625 r180 bottom (schematic designator C38)
C38_2 "10uF, 1210" CC3225-1210 1967,2004 r180 bottom (schematic designator C38)
C38_3 "10uF, 1210" CC3225-1210 1972,1395 r180 bottom (schematic designator C38)
C38_4 "10uF, 1210" CC3225-1210 1974,800 r180 bottom (schematic designator C38)
C39_1 "0.1uF" 0603 2945,2380 r0 bottom (schematic designator C39)
C39_2 "0.1uF" 0603 2947,1759 r0 bottom (schematic designator C39)
C39_3 "0.1uF" 0603 2952,1150 r0 bottom (schematic designator C39)
C39_4 "0.1uF" 0603 2952,559 r0 bottom (schematic designator C39)
C40_1 "5pF" 0603 1710,2420 r270 top (schematic designator C40)
C40_2 "5pF" 0603 1712,1799 r270 top (schematic designator C40)
C40_3 "5pF" 0603 1717,1190 r270 top (schematic designator C40)
C40_4 "5pF" 0603 1719,595 r270 top (schematic designator C40)
C41_1 "0.1uF" 0603 2095,2470 r270 bottom (schematic designator C41)
C41_2 "0.1uF" 0603 2097,1849 r270 bottom (schematic designator C41)
C41_3 "0.1uF" 0603 2102,1240 r270 bottom (schematic designator C41)
C41_4 "0.1uF" 0603 2104,645 r270 bottom (schematic designator C41)
C42_1 "1nF" 0603 2000,2470 r270 bottom (schematic designator C42)
C42_2 "1nF" 0603 2002,1849 r270 bottom (schematic designator C42)
C42_3 "1nF" 0603 2007,1240 r270 bottom (schematic designator C42)
C42_4 "1nF" 0603 2009,645 r270 bottom (schematic designator C42)
C43_1 "5pF" 0603 2165,2310 r270 top (schematic designator C43)
C43_2 "5pF" 0603 2167,1689 r270 top (schematic designator C43)
C43_3 "5pF" 0603 2172,1080 r270 top (schematic designator C43)
C43_4 "5pF" 0603 2174,485 r270 top (schematic designator C43)
C44 "1nF" 0603 3975,1210 r0 bottom
C45_1 "0.1uF" 0603 3392,2421 r90 top (schematic designator C45)
C45_2 "0.1uF" 0603 3394,1800 r90 top (schematic designator C45)
C45_3 "0.1uF" 0603 3399,1191 r90 top (schematic designator C45)
C45_4 "0.1uF" 0603 3399,600 r90 top (schematic designator C45)
C46_1 "0.1uF" 0603 3422.5,2522 r0 bottom (schematic designator C46)
C46_2 "0.1uF" 0603 3422.5,1897 r0 bottom (schematic designator C46)
C46_3 "0.1uF" 0603 3422.5,1276 r0 bottom (schematic designator C46)
C46_4 "0.1uF" 0603 3420.5,674 r0 bottom (schematic designator C46)
C47_1 "1nF" 0603 2888,2541 r180 top (schematic designator C47)
C47_2 "1nF" 0603 2890,1920 r180 top (schematic designator C47)
C47_3 "1nF" 0603 2895,1311 r180 top (schematic designator C47)
C47_4 "1nF" 0603 2895,720 r180 top (schematic designator C47)
C48_1 "10uF" 0603 3191,2481 r270 top (schematic designator C48)
C48_2 "10uF" 0603 3193,1860 r270 top (schematic designator C48)
C48_3 "10uF" 0603 3198,1251 r270 top (schematic designator C48)
C48_4 "10uF" 0603 3198,660 r270 top (schematic designator C48)
C49_1 "0.1uF" 0603 3611.5,2107 r180 bottom (schematic designator C49)
C49_2 "0.1uF" 0603 3611.5,1482 r180 bottom (schematic designator C49)
C49_3 "0.1uF" 0603 3611.5,861 r180 bottom (schematic designator C49)
C49_4 "0.1uF" 0603 3611.5,237 r180 bottom (schematic designator C49)
C50_1 "0.1uF" 0603 3609.5,2314 r180 bottom (schematic designator C50)
C50_2 "0.1uF" 0603 3609.5,1689 r180 bottom (schematic designator C50)
C50_3 "0.1uF" 0603 3609.5,1068 r180 bottom (schematic designator C50)
C50_4 "0.1uF" 0603 3609.5,444 r180 bottom (schematic designator C50)
C51_1 "0.1uF" 0603 3419.5,2314 r0 bottom (schematic designator C51)
C51_2 "0.1uF" 0603 3419.5,1689 r0 bottom (schematic designator C51)
C51_3 "0.1uF" 0603 3419.5,1068 r0 bottom (schematic designator C51)
C51_4 "0.1uF" 0603 3419.5,444 r0 bottom (schematic designator C51)
C52_1 "DNL" 0603 2408,2287 r90 top (schematic designator C52)
C52_2 "DNL" 0603 2410,1666 r90 top (schematic designator C52)
C52_3 "DNL" 0603 2415,1057 r90 top (schematic designator C52)
C52_4 "DNL" 0603 2415,466 r90 top (schematic designator C52)
C53_1 "0.1uF" 0603 2508,2600 r0 top (schematic designator C53)
C53_2 "0.1uF" 0603 2510,1979 r0 top (schematic designator C53)
C53_3 "0.1uF" 0603 2515,1370 r0 top (schematic designator C53)
C53_4 "0.1uF" 0603 2513,780 r0 top (schematic designator C53)
C54_1 "0.1uF" 0603 2700,2400 r90 top (schematic designator C54)
C54_2 "0.1uF" 0603 2702,1779 r90 top (schematic designator C54)
C54_3 "0.1uF" 0603 2707,1170 r90 top (schematic designator C54)
C54_4 "0.1uF" 0603 2707,579 r90 top (schematic designator C54)
C58_1 "0.1uF" 0603 1301,2400 r270 bottom (schematic designator C58)
C58_2 "0.1uF" 0603 1301,1780 r270 bottom (schematic designator C58)
C58_3 "0.1uF" 0603 1301,1155 r270 bottom (schematic designator C58)
C58_4 "0.1uF" 0603 1301,535 r270 bottom (schematic designator C58)
C59_1 "0.1uF" 0603 1131,2540 r180 bottom (schematic designator C59)
C59_2 "0.1uF" 0603 1131,1920 r180 bottom (schematic designator C59)
C59_3 "0.1uF" 0603 1131,1295 r180 bottom (schematic designator C59)
C59_4 "0.1uF" 0603 1131,675 r180 bottom (schematic designator C59)
C60_1 "0.1uF" 0603 3263,2576 r0 top (schematic designator C60)
C60_2 "0.1uF" 0603 3265,1955 r0 top (schematic designator C60)
C60_3 "0.1uF" 0603 3270,1346 r0 top (schematic designator C60)
C60_4 "0.1uF" 0603 3270,755 r0 top (schematic designator C60)
C61_1 "0.1uF" 0603 1471,2180 r180 bottom (schematic designator C61)
C61_2 "0.1uF" 0603 1473,1559 r180 bottom (schematic designator C61)
C61_3 "0.1uF" 0603 1478,950 r180 bottom (schematic designator C61)
C61_4 "0.1uF" 0603 1480,355 r180 bottom (schematic designator C61)
C62_1 "0.1uF" 0603 1458,2246 r180 bottom (schematic designator C62)
C62_2 "0.1uF" 0603 1460,1625 r180 bottom (schematic designator C62)
C62_3 "0.1uF" 0603 1465,1016 r180 bottom (schematic designator C62)
C62_4 "0.1uF" 0603 1467,421 r180 bottom (schematic designator C62)
C63_1 "10uF, 1210" CC3225-1210 1600,2515 r0 bottom (schematic designator C63)
C63_2 "10uF, 1210" CC3225-1210 1602,1894 r0 bottom (schematic designator C63)
C63_3 "10uF, 1210" CC3225-1210 1607,1285 r0 bottom (schematic designator C63)
C63_4 "10uF, 1210" CC3225-1210 1609,690 r0 bottom (schematic designator C63)
C64_1 "10uF, 1210" CC3225-1210 2010,2321 r180 bottom (schematic designator C64)
C64_2 "10uF, 1210" CC3225-1210 2012,1700 r180 bottom (schematic designator C64)
C64_3 "10uF, 1210" CC3225-1210 2017,1091 r180 bottom (schematic designator C64)
C64_4 "10uF, 1210" CC3225-1210 2019,496 r180 bottom (schematic designator C64)
C65_1 "10uF, 1210" CC3225-1210 2971,2505 r0 bottom (schematic designator C65)
C65_2 "10uF, 1210" CC3225-1210 2971,1880 r0 bottom (schematic designator C65)
C65_3 "10uF, 1210" CC3225-1210 2964,1275 r0 bottom (schematic designator C65)
C65_4 "10uF, 1210" CC3225-1210 2968,685 r0 bottom (schematic designator C65)
C66_1 "10uF, 1210" CC3225-1210 2666,2402 r270 bottom (schematic designator C66)
C66_2 "10uF, 1210" CC3225-1210 2668,1784 r270 bottom (schematic designator C66)
C66_3 "10uF, 1210" CC3225-1210 2661,1173 r270 bottom (schematic designator C66)
C66_4 "10uF, 1210" CC3225-1210 2664,581 r270 bottom (schematic designator C66)
C67_1 "1nF" 0603 3733,2516 r180 top (schematic designator C67)
C67_2 "1nF" 0603 3739,1897 r180 top (schematic designator C67)
C67_3 "1nF" 0603 3739,1270 r180 top (schematic designator C67)
C67_4 "1nF" 0603 3735,646 r180 top (schematic designator C67)
C68_1 "1nF" 0603 3773,2266 r180 top (schematic designator C68)
C68_2 "1nF" 0603 3776,1639 r180 top (schematic designator C68)
C68_3 "1nF" 0603 3777,1020 r180 top (schematic designator C68)
C68_4 "1nF" 0603 3777,394 r180 top (schematic designator C68)
C69_1 "1nF" 0603 3773,2356 r180 top (schematic designator C69)
C69_2 "1nF" 0603 3776,1725 r180 top (schematic designator C69)
C69_3 "1nF" 0603 3777,1108 r180 top (schematic designator C69)
C69_4 "1nF" 0603 3777,478 r180 top (schematic designator C69)
Designator1 "Comment" McGillLogo1 5605,2145 r270 bottom
DP1 "LED, 0805, Yellow" 0805L 4555,2557 r90 top
FM1 "Fiducial" Fiducial_mark 101.57,2415 r0 top
FM2 "Fiducial" Fiducial_mark 5570,730 r0 top
FM3 "Fiducial" Fiducial_mark 251.57,530 r0 top
J1 "DB37F_Resize" "DSUB37-F (590MILS)" 175.57,1146 r90 top
J2 "DB37M_Resize" "DSUB37-M (590MILS)" 5493,1798 r270 top
J4 "WM2889" HDR1X3_MolexVertical 4553,217 r0 top
L1_1 "Inductance" 0603 3327,2157 r90 top (schematic designator L1)
L1_2 "Inductance" 0603 3329,1536 r90 top (schematic designator L1)
L1_3 "Inductance" 0603 3334,927 r90 top (schematic designator L1)
L1_4 "Inductance" 0603 3334,336 r90 top (schematic designator L1)
L2_1 "Transformer" TTWB 4646,2400 r270 top (schematic designator L2)
L2_2 "Transformer" TTWB 4646,1780 r270 top (schematic designator L2)
L2_3 "Transformer" TTWB 4646,1155 r270 top (schematic designator L2)
L2_4 "Transformer" TTWB 4646,535 r270 top (schematic designator L2)
L3 "ELL-ATV330M" ELLATV 4373,770 r0 top
L5 "22uH" SRR4028 4205,2240 r180 top
L6 "22uH" SRR4028 4430,2240 r180 top
L7_1 "10uH" 0805 2637,2624 r0 top (schematic designator L7)
L7_2 "10uH" 0805 2639,2003 r0 top (schematic designator L7)
L7_3 "10uH" 0805 2644,1394 r0 top (schematic designator L7)
L7_4 "10uH" 0805 2729,780 r270 top (schematic designator L7)
L8_1 "10uH" 0805 2707,2539 r180 top (schematic designator L8)
L8_2 "10uH" 0805 2709,1918 r180 top (schematic designator L8)
L8_3 "10uH" 0805 2714,1309 r180 top (schematic designator L8)
L8_4 "10uH" 0805 2653,780 r270 top (schematic designator L8)
L9_1 "Inductance" 0603 3325,2481 r270 top (schematic designator L9)
L9_2 "Inductance" 0603 3327,1860 r270 top (schematic designator L9)
L9_3 "Inductance" 0603 3332,1251 r270 top (schematic designator L9)
L9_4 "Inductance" 0603 3332,660 r270 top (schematic designator L9)
L11_1 "Transformer" TTWB 4644,2695 r270 top (schematic designator L11)
L11_2 "Transformer" TTWB 4644,2075 r270 top (schematic designator L11)
L11_3 "Transformer" TTWB 4644,1450 r270 top (schematic designator L11)
L11_4 "Transformer" TTWB 4644,830 r270 top (schematic designator L11)
Q1_1 "MMBT2222A" SOT23 1233,2368.5 r90 bottom (schematic designator Q1)
Q1_2 "MMBT2222A" SOT23 1227,1748 r90 bottom (schematic designator Q1)
Q1_3 "MMBT2222A" SOT23 1228,1124 r90 bottom (schematic designator Q1)
Q1_4 "MMBT2222A" SOT23 1227,503.5 r90 bottom (schematic designator Q1)
Q2_1 "BC849C,215 - DNL" SOT23 1735,2670 r270 bottom (schematic designator Q2)
Q2_2 "BC849C,215 - DNL" SOT23 1737,2049 r270 bottom (schematic designator Q2)
Q2_3 "BC849C,215 - DNL" SOT23 1742,1440 r270 bottom (schematic designator Q2)
Q2_4 "BC849C,215 - DNL" SOT23 1744,845 r270 bottom (schematic designator Q2)
R1_1 "20, 0805" 0805 1051,2360 r0 top (schematic designator R1)
R1_2 "20, 0805" 0805 1051,1740 r0 top (schematic designator R1)
R1_3 "20, 0805" 0805 1051,1115 r0 top (schematic designator R1)
R1_4 "20, 0805" 0805 1051,496 r0 top (schematic designator R1)
R2_1 "20, 0805" 0805 1329,2367 r180 top (schematic designator R2)
R2_2 "20, 0805" 0805 1330,1752 r180 top (schematic designator R2)
R2_3 "20, 0805" 0805 1329,1122 r180 top (schematic designator R2)
R2_4 "20, 0805" 0805 1329,504 r180 top (schematic designator R2)
R3_1 "DNL" 0805 1191,2355 r270 top (schematic designator R3)
R3_2 "DNL" 0805 1191,1735 r270 top (schematic designator R3)
R3_3 "DNL" 0805 1191,1110 r270 top (schematic designator R3)
R3_4 "DNL" 0805 1191,490 r270 top (schematic designator R3)
R4_1 "DNL, 1206" 1206 4947,2350 r270 top (schematic designator R4)
R4_2 "DNL, 1206" 1206 4947,1740 r270 top (schematic designator R4)
R4_3 "DNL, 1206" 1206 4947,1105 r270 top (schematic designator R4)
R4_4 "DNL, 1206" 1206 4947,490 r270 top (schematic designator R4)
R5_1 "20, 0805" 0805 1051,2285 r0 top (schematic designator R5)
R5_2 "20, 0805" 0805 1051,1665 r0 top (schematic designator R5)
R5_3 "20, 0805" 0805 1051,1040 r0 top (schematic designator R5)
R5_4 "20, 0805" 0805 1051,420 r0 top (schematic designator R5)
R6_1 "1k" 0603 1148,2231 r0 bottom (schematic designator R6)
R6_2 "1k" 0603 1148,1606 r0 bottom (schematic designator R6)
R6_3 "1k" 0603 1147,979 r0 bottom (schematic designator R6)
R6_4 "1k" 0603 1148,363 r0 bottom (schematic designator R6)
R7_1 "10" 0603 1071,2470 r0 bottom (schematic designator R7)
R7_2 "10" 0603 1071,1850 r0 bottom (schematic designator R7)
R7_3 "10" 0603 1071,1225 r0 bottom (schematic designator R7)
R7_4 "10" 0603 1071,605 r0 bottom (schematic designator R7)
R8_1 "11k" 0603 3029,2146 r0 top (schematic designator R8)
R8_2 "11k" 0603 3031,1525 r0 top (schematic designator R8)
R8_3 "11k" 0603 3036,916 r0 top (schematic designator R8)
R8_4 "11k" 0603 3036,325 r0 top (schematic designator R8)
R9_1 "12k" 0603 2958,2146 r180 top (schematic designator R9)
R9_2 "12k" 0603 2960,1525 r180 top (schematic designator R9)
R9_3 "12k" 0603 2965,916 r180 top (schematic designator R9)
R9_4 "12k" 0603 2965,325 r180 top (schematic designator R9)
R10_1 "20, 0805" 0805 1329,2290 r180 top (schematic designator R10)
R10_2 "20, 0805" 0805 1330,1676 r180 top (schematic designator R10)
R10_3 "20, 0805" 0805 1329,1047 r180 top (schematic designator R10)
R10_4 "20, 0805" 0805 1329,428 r180 top (schematic designator R10)
R11_1 "DNL" 0603 4730,2710 r0 bottom (schematic designator R11)
R11_2 "DNL" 0603 4730,2090 r0 bottom (schematic designator R11)
R11_3 "DNL" 0603 4730,1465 r0 bottom (schematic designator R11)
R11_4 "DNL" 0603 4730,845 r0 bottom (schematic designator R11)
R12_1 "DNL" 0603 3259,2157 r90 top (schematic designator R12)
R12_2 "DNL" 0603 3261,1536 r90 top (schematic designator R12)
R12_3 "DNL" 0603 3266,927 r90 top (schematic designator R12)
R12_4 "DNL" 0603 3266,336 r90 top (schematic designator R12)
R13_1 "0" 0603 3192,2286 r0 top (schematic designator R13)
R13_2 "0" 0603 3194,1665 r0 top (schematic designator R13)
R13_3 "0" 0603 3199,1056 r0 top (schematic designator R13)
R13_4 "0" 0603 3199,465 r0 top (schematic designator R13)
R14_1 "4.99" 0603 3123,2278 r270 top (schematic designator R14)
R14_2 "4.99" 0603 3125,1657 r270 top (schematic designator R14)
R14_3 "4.99" 0603 3130,1048 r270 top (schematic designator R14)
R14_4 "4.99" 0603 3130,457 r270 top (schematic designator R14)
R15 "DNL" 0603 4030,1075 r90 bottom
R16 "39k" 0603 4220,1920 r0 bottom
R17 "0" 0603 4848,218 r0 bottom
R18 "4.99k" 0603 5295,675 r90 bottom
R19_1 "750" 0603 1111,2578 r180 top (schematic designator R19)
R19_2 "750" 0603 1111,1957 r180 top (schematic designator R19)
R19_3 "750" 0603 1111,1332 r180 top (schematic designator R19)
R19_4 "750" 0603 1111,712 r180 top (schematic designator R19)
R20_1 "750" 0603 1251,2585 r0 top (schematic designator R20)
R20_2 "750" 0603 1251,1965 r0 top (schematic designator R20)
R20_3 "750" 0603 1251,1340 r0 top (schematic designator R20)
R20_4 "750" 0603 1251,720 r0 top (schematic designator R20)
R21_1 "DNL" 0603 1181,2576 r270 top (schematic designator R21)
R21_2 "DNL" 0603 1181,1954 r270 top (schematic designator R21)
R21_3 "DNL" 0603 1181,1325 r270 top (schematic designator R21)
R21_4 "DNL" 0603 1181,709 r270 top (schematic designator R21)
R22_1 "4.99k" 0603 3552.5,2652 r270 bottom (schematic designator R22)
R22_2 "4.99k" 0603 3552.5,2027 r270 bottom (schematic designator R22)
R22_3 "4.99k" 0603 3552.5,1406 r270 bottom (schematic designator R22)
R22_4 "4.99k" 0603 3552.5,782 r270 bottom (schematic designator R22)
R23_1 "4.99k" 0603 3482.5,2592 r180 bottom (schematic designator R23)
R23_2 "4.99k" 0603 3482.5,1967 r180 bottom (schematic designator R23)
R23_3 "4.99k" 0603 3482.5,1346 r180 bottom (schematic designator R23)
R23_4 "4.99k" 0603 3480.5,744 r180 bottom (schematic designator R23)
R24_1 "2k" 0603 3458.5,2245 r180 bottom (schematic designator R24)
R24_2 "2k" 0603 3458.5,1620 r180 bottom (schematic designator R24)
R24_3 "2k" 0603 3458.5,999 r180 bottom (schematic designator R24)
R24_4 "2k" 0603 3458.5,375 r180 bottom (schematic designator R24)
R25_1 "2k" 0603 3560.5,2238 r270 bottom (schematic designator R25)
R25_2 "2k" 0603 3560.5,1613 r270 bottom (schematic designator R25)
R25_3 "2k" 0603 3560.5,992 r270 bottom (schematic designator R25)
R25_4 "2k" 0603 3560.5,368 r270 bottom (schematic designator R25)
R26_1 "499" 0603 3549.5,2444 r270 bottom (schematic designator R26)
R26_2 "499" 0603 3549.5,1819 r270 bottom (schematic designator R26)
R26_3 "499" 0603 3549.5,1198 r270 bottom (schematic designator R26)
R26_4 "499" 0603 3549.5,574 r270 bottom (schematic designator R26)
R27_1 "100" 0603 3479.5,2384 r180 bottom (schematic designator R27)
R27_2 "100" 0603 3479.5,1759 r180 bottom (schematic designator R27)
R27_3 "100" 0603 3479.5,1138 r180 bottom (schematic designator R27)
R27_4 "100" 0603 3479.5,514 r180 bottom (schematic designator R27)
R28_1 "20k" 0603 1562,2630 r0 top (schematic designator R28)
R28_2 "20k" 0603 1564,2009 r0 top (schematic designator R28)
R28_3 "20k" 0603 1569,1400 r0 top (schematic designator R28)
R28_4 "20k" 0603 1571,805 r0 top (schematic designator R28)
R29_1 "11k" 0603 1562,2565 r0 top (schematic designator R29)
R29_2 "11k" 0603 1564,1944 r0 top (schematic designator R29)
R29_3 "11k" 0603 1569,1335 r0 top (schematic designator R29)
R29_4 "11k" 0603 1571,740 r0 top (schematic designator R29)
R30_1 "11k" 0603 1420,2575 r0 top (schematic designator R30)
R30_2 "11k" 0603 1422,1954 r0 top (schematic designator R30)
R30_3 "11k" 0603 1427,1345 r0 top (schematic designator R30)
R30_4 "11k" 0603 1429,750 r0 top (schematic designator R30)
R31_1 "11k" 0603 1687,2650 r0 top (schematic designator R31)
R31_2 "11k" 0603 1689,2029 r0 top (schematic designator R31)
R31_3 "11k" 0603 1694,1420 r0 top (schematic designator R31)
R31_4 "11k" 0603 1696,825 r0 top (schematic designator R31)
R32 "DNL" 0603 4375,420 r0 bottom
R33_1 "100" 0603 1895,2535 r0 bottom (schematic designator R33)
R33_2 "100" 0603 1897,1914 r0 bottom (schematic designator R33)
R33_3 "100" 0603 1902,1305 r0 bottom (schematic designator R33)
R33_4 "100" 0603 1904,710 r0 bottom (schematic designator R33)
R34_1 "DNL" 0603 1840,2765 r180 bottom (schematic designator R34)
R34_2 "DNL" 0603 1845,2145 r180 bottom (schematic designator R34)
R34_3 "DNL" 0603 1845,1535 r180 bottom (schematic designator R34)
R34_4 "DNL" 0603 1850,940 r180 bottom (schematic designator R34)
R35_1 "100, 1206" 1206 4947,2645 r270 top (schematic designator R35)
R35_2 "100, 1206" 1206 4947,2023 r270 top (schematic designator R35)
R35_3 "100, 1206" 1206 4947,1395 r270 top (schematic designator R35)
R35_4 "100, 1206" 1206 4947,785 r270 top (schematic designator R35)
R36_1 "750" 0603 1111,2503 r180 top (schematic designator R36)
R36_2 "750" 0603 1111,1882 r180 top (schematic designator R36)
R36_3 "750" 0603 1111,1257 r180 top (schematic designator R36)
R36_4 "750" 0603 1111,637 r180 top (schematic designator R36)
R37_1 "750" 0603 1251,2500 r0 top (schematic designator R37)
R37_2 "750" 0603 1251,1880 r0 top (schematic designator R37)
R37_3 "750" 0603 1251,1255 r0 top (schematic designator R37)
R37_4 "750" 0603 1251,635 r0 top (schematic designator R37)
R38_1 "20k" 0603 1111,2645 r180 top (schematic designator R38)
R38_2 "20k" 0603 1111,2025 r180 top (schematic designator R38)
R38_3 "20k" 0603 1111,1400 r180 top (schematic designator R38)
R38_4 "20k" 0603 1111,780 r180 top (schematic designator R38)
R39_1 "DNL" 0603 4730,2485 r0 bottom (schematic designator R39)
R39_2 "DNL" 0603 4730,1865 r0 bottom (schematic designator R39)
R39_3 "DNL" 0603 4730,1240 r0 bottom (schematic designator R39)
R39_4 "DNL" 0603 4730,620 r0 bottom (schematic designator R39)
R40_1 "0" 0603 3065,2595 r270 top (schematic designator R40)
R40_2 "0" 0603 3067,1974 r270 top (schematic designator R40)
R40_3 "0" 0603 3072,1365 r270 top (schematic designator R40)
R40_4 "0" 0603 3072,774 r270 top (schematic designator R40)
R41_1 "1k" 0603 3456.5,2177 r180 bottom (schematic designator R41)
R41_2 "1k" 0603 3456.5,1552 r180 bottom (schematic designator R41)
R41_3 "1k" 0603 3456.5,931 r180 bottom (schematic designator R41)
R41_4 "1k" 0603 3456.5,307 r180 bottom (schematic designator R41)
R42 "0" 0603 775,2800 r180 top
R43_1 "DNL" 0603 2969,2537 r90 top (schematic designator R43)
R43_2 "DNL" 0603 2971,1916 r90 top (schematic designator R43)
R43_3 "DNL" 0603 2976,1307 r90 top (schematic designator R43)
R43_4 "DNL" 0603 2976,716 r90 top (schematic designator R43)
R44_1 "DNL" 0603 3258,2481 r270 top (schematic designator R44)
R44_2 "DNL" 0603 3260,1860 r270 top (schematic designator R44)
R44_3 "DNL" 0603 3265,1251 r270 top (schematic designator R44)
R44_4 "DNL" 0603 3265,660 r270 top (schematic designator R44)
R45_1 "0" 0603 3192,2353 r0 top (schematic designator R45)
R45_2 "0" 0603 3194,1732 r0 top (schematic designator R45)
R45_3 "0" 0603 3199,1123 r0 top (schematic designator R45)
R45_4 "0" 0603 3199,532 r0 top (schematic designator R45)
R46_1 "DNL" 0603 2408,2423 r180 top (schematic designator R46)
R46_2 "DNL" 0603 2410,1802 r180 top (schematic designator R46)
R46_3 "DNL" 0603 2415,1193 r180 top (schematic designator R46)
R46_4 "DNL" 0603 2417,598 r180 top (schematic designator R46)
R47_1 "DNL" 0603 2693,2143 r180 top (schematic designator R47)
R47_2 "DNL" 0603 2695,1522 r180 top (schematic designator R47)
R47_3 "DNL" 0603 2700,913 r180 top (schematic designator R47)
R47_4 "DNL" 0603 2700,322 r180 top (schematic designator R47)
R48_1 "0" 0603 1111,2434 r180 top (schematic designator R48)
R48_2 "0" 0603 1111,1814 r180 top (schematic designator R48)
R48_3 "0" 0603 1111,1190 r180 top (schematic designator R48)
R48_4 "0" 0603 1111,570 r180 top (schematic designator R48)
R49_1 "4.99" 0603 3123,2352 r90 top (schematic designator R49)
R49_2 "4.99" 0603 3125,1731 r90 top (schematic designator R49)
R49_3 "4.99" 0603 3130,1122 r90 top (schematic designator R49)
R49_4 "4.99" 0603 3130,531 r90 top (schematic designator R49)
R50_1 "402" 0603 2235,2560 r90 top (schematic designator R50)
R50_2 "402" 0603 2237,1939 r90 top (schematic designator R50)
R50_3 "402" 0603 2242,1330 r90 top (schematic designator R50)
R50_4 "402" 0603 2244,735 r90 top (schematic designator R50)
R51_1 "4.22k" 0603 1630,2180 r90 top (schematic designator R51)
R51_2 "4.22k" 0603 1632,1559 r90 top (schematic designator R51)
R51_3 "4.22k" 0603 1637,950 r90 top (schematic designator R51)
R51_4 "4.22k" 0603 1639,355 r90 top (schematic designator R51)
R52_1 "0" 0603 1845,2245 r0 top (schematic designator R52)
R52_2 "0" 0603 1847,1624 r0 top (schematic designator R52)
R52_3 "0" 0603 1852,1015 r0 top (schematic designator R52)
R52_4 "0" 0603 1854,420 r0 top (schematic designator R52)
R53_1 "10" 0603 1480,2369 r180 top (schematic designator R53)
R53_2 "10" 0603 1482,1748 r180 top (schematic designator R53)
R53_3 "10" 0603 1487,1139 r180 top (schematic designator R53)
R53_4 "10" 0603 1489,544 r180 top (schematic designator R53)
R54_1 "100" 0603 1870,2420 r270 top (schematic designator R54)
R54_2 "100" 0603 1872,1799 r270 top (schematic designator R54)
R54_3 "100" 0603 1877,1190 r270 top (schematic designator R54)
R54_4 "100" 0603 1879,595 r270 top (schematic designator R54)
R55_1 "49.9, 0805" 0805 2165,2480 r0 top (schematic designator R55)
R55_2 "49.9, 0805" 0805 2167,1859 r0 top (schematic designator R55)
R55_3 "49.9, 0805" 0805 2172,1250 r0 top (schematic designator R55)
R55_4 "49.9, 0805" 0805 2174,655 r0 top (schematic designator R55)
R56_1 "100" 0603 1775,2285 r270 top (schematic designator R56)
R56_2 "100" 0603 1777,1664 r270 top (schematic designator R56)
R56_3 "100" 0603 1782,1055 r270 top (schematic designator R56)
R56_4 "100" 0603 1784,460 r270 top (schematic designator R56)
R57_1 "49.9, 0805" 0805 2165,2390 r0 top (schematic designator R57)
R57_2 "49.9, 0805" 0805 2167,1769 r0 top (schematic designator R57)
R57_3 "49.9, 0805" 0805 2172,1160 r0 top (schematic designator R57)
R57_4 "49.9, 0805" 0805 2174,565 r0 top (schematic designator R57)
R58_1 "150" 0603 1775,2420 r270 top (schematic designator R58)
R58_2 "150" 0603 1777,1799 r270 top (schematic designator R58)
R58_3 "150" 0603 1782,1190 r270 top (schematic designator R58)
R58_4 "150" 0603 1784,595 r270 top (schematic designator R58)
R59_1 "100" 0603 1557,2223 r90 top (schematic designator R59)
R59_2 "100" 0603 1559,1602 r90 top (schematic designator R59)
R59_3 "100" 0603 1564,993 r90 top (schematic designator R59)
R59_4 "100" 0603 1566,398 r90 top (schematic designator R59)
R60_1 "402" 0603 2245,2310 r270 top (schematic designator R60)
R60_2 "402" 0603 2247,1689 r270 top (schematic designator R60)
R60_3 "402" 0603 2252,1080 r270 top (schematic designator R60)
R60_4 "402" 0603 2254,485 r270 top (schematic designator R60)
R61_1 "DNL" 0603 1915,2715 r0 bottom (schematic designator R61)
R61_2 "DNL" 0603 1917,2094 r0 bottom (schematic designator R61)
R61_3 "DNL" 0603 1922,1485 r0 bottom (schematic designator R61)
R61_4 "DNL" 0603 1924,890 r0 bottom (schematic designator R61)
R62_1 "DNL" 0603 1675,2610 r90 bottom (schematic designator R62)
R62_2 "DNL" 0603 1677,1989 r90 bottom (schematic designator R62)
R62_3 "DNL" 0603 1682,1380 r90 bottom (schematic designator R62)
R62_4 "DNL" 0603 1684,785 r90 bottom (schematic designator R62)
R63_1 "0" 0603 1276,2480 r90 bottom (schematic designator R63)
R63_2 "0" 0603 1276,1860 r90 bottom (schematic designator R63)
R63_3 "0" 0603 1276,1235 r90 bottom (schematic designator R63)
R63_4 "0" 0603 1276,615 r90 bottom (schematic designator R63)
R64_1 "DNL" 0603 2567,2531 r180 top (schematic designator R64)
R64_2 "DNL" 0603 2569,1910 r180 top (schematic designator R64)
R64_3 "DNL" 0603 2574,1301 r180 top (schematic designator R64)
R64_4 "DNL" 0603 2574,710 r180 top (schematic designator R64)
R65_1 "DNL" 0603 2700,2269 r90 top (schematic designator R65)
R65_2 "DNL" 0603 2702,1648 r90 top (schematic designator R65)
R65_3 "DNL" 0603 2707,1039 r90 top (schematic designator R65)
R65_4 "DNL" 0603 2707,448 r90 top (schematic designator R65)
R66 "0" 0603 4886,2804 r0 top
R67 "4.99k" 0603 4355,950 r180 bottom
R68 "4.99k" 0603 4545,1305 r90 top
R69_1 "5.76k" 0603 2828,2272 r90 top (schematic designator R69)
R69_2 "5.76k" 0603 2830,1651 r90 top (schematic designator R69)
R69_3 "5.76k" 0603 2835,1042 r90 top (schematic designator R69)
R69_4 "5.76k" 0603 2835,451 r90 top (schematic designator R69)
R70_1 "5.76k" 0603 2829,2462 r270 top (schematic designator R70)
R70_2 "5.76k" 0603 2831,1841 r270 top (schematic designator R70)
R70_3 "5.76k" 0603 2836,1232 r270 top (schematic designator R70)
R70_4 "5.76k" 0603 2836,641 r270 top (schematic designator R70)
R71_1 "DNL" 0603 2100,2635 r180 top (schematic designator R71)
R71_2 "DNL" 0603 2102,2014 r180 top (schematic designator R71)
R71_3 "DNL" 0603 2107,1405 r180 top (schematic designator R71)
R71_4 "DNL" 0603 2109,810 r180 top (schematic designator R71)
R72_1 "DNL" 0603 1700,2275 r270 top (schematic designator R72)
R72_2 "DNL" 0603 1702,1654 r270 top (schematic designator R72)
R72_3 "DNL" 0603 1707,1045 r270 top (schematic designator R72)
R72_4 "DNL" 0603 1709,450 r270 top (schematic designator R72)
R73 "0" 0603 726.57,365 r270 top
R74_1 "DNL" 0603 1875,2345 r90 bottom (schematic designator R74)
R74_2 "DNL" 0603 1877,1724 r90 bottom (schematic designator R74)
R74_3 "DNL" 0603 1882,1115 r90 bottom (schematic designator R74)
R74_4 "DNL" 0603 1884,520 r90 bottom (schematic designator R74)
R75 "100" 0603 4430,1270 r90 bottom
R76 "100" 0603 4035,1415 r270 bottom
R77_1 "DNL" 0603 4790,2360 r180 bottom (schematic designator R77)
R77_2 "DNL" 0603 4790,1740 r180 bottom (schematic designator R77)
R77_3 "DNL" 0603 4790,1115 r180 bottom (schematic designator R77)
R77_4 "DNL" 0603 4790,495 r180 bottom (schematic designator R77)
R78_1 "DNL" 0603 4790,2255 r180 bottom (schematic designator R78)
R78_2 "DNL" 0603 4790,1635 r180 bottom (schematic designator R78)
R78_3 "DNL" 0603 4790,1010 r180 bottom (schematic designator R78)
R78_4 "DNL" 0603 4790,390 r180 bottom (schematic designator R78)
R79_1 "DNL" 0603 4790,2640 r180 bottom (schematic designator R79)
R79_2 "DNL" 0603 4790,2022 r180 bottom (schematic designator R79)
R79_3 "DNL" 0603 4790,1395 r180 bottom (schematic designator R79)
R79_4 "DNL" 0603 4790,775 r180 bottom (schematic designator R79)
R80_1 "DNL" 0603 4790,2560 r180 bottom (schematic designator R80)
R80_2 "DNL" 0603 4790,1932 r180 bottom (schematic designator R80)
R80_3 "DNL" 0603 4790,1315 r180 bottom (schematic designator R80)
R80_4 "DNL" 0603 4790,695 r180 bottom (schematic designator R80)
R81_1 "DNL" 0603 1450,2180 r180 top (schematic designator R81)
R81_2 "DNL" 0603 1452,1559 r180 top (schematic designator R81)
R81_3 "DNL" 0603 1457,950 r180 top (schematic designator R81)
R81_4 "DNL" 0603 1459,355 r180 top (schematic designator R81)
R82_1 "DNL" 0603 1390,2245 r0 top (schematic designator R82)
R82_2 "DNL" 0603 1392,1624 r0 top (schematic designator R82)
R82_3 "DNL" 0603 1397,1015 r0 top (schematic designator R82)
R82_4 "DNL" 0603 1399,420 r0 top (schematic designator R82)
R83 "1.58k" 0603 4545,1180 r90 top
R84 "4.99k" 0603 4077.5,1435 r270 top
R85 "2k" 0603 4555,2707 r90 top
R86 "4.99k" 0603 4075,1730 r270 top
R87 "DNL" 0603 5295,605 r270 bottom
SH1 "LeaderTech 20S-CBS-2x0.5x0.2 - DIVIDE QUANITY REQURIED BY 10!" "SHIELD BASE CORNER" 1055,215 r180 top locked
SH2 "LeaderTech 20S-CBS-2x0.5x0.2 - DIVIDE QUANITY REQURIED BY 10!" "SHIELD BASE" 1555,215 r180 top locked
SH3 "LeaderTech 20S-CBS-2x0.5x0.2 - DIVIDE QUANITY REQURIED BY 10!" "SHIELD BASE" 2055,215 r180 top locked
SH4 "LeaderTech 20S-CBS-2x0.5x0.2 - DIVIDE QUANITY REQURIED BY 10!" "SHIELD BASE" 2555,215 r180 top locked
SH5 "LeaderTech 20S-CBS-2x0.5x0.2 - DIVIDE QUANITY REQURIED BY 10!" "SHIELD BASE" 3055,215 r180 top locked
SH6 "LeaderTech 20S-CBS-2x0.5x0.2 - DIVIDE QUANITY REQURIED BY 10!" "SHIELD BASE" 3555,215 r180 top locked
SH8 "LeaderTech 20S-CBS-2x0.5x0.2 - DIVIDE QUANITY REQURIED BY 10!" "SHIELD BASE CORNER" 3936,346 r270 top locked
SH9 "LeaderTech 20S-CBS-2x0.5x0.2 - DIVIDE QUANITY REQURIED BY 10!" "SHIELD BASE" 3936,846 r270 top locked
SH10 "LeaderTech 20S-CBS-2x0.5x0.2 - DIVIDE QUANITY REQURIED BY 10!" "SHIELD BASE" 3936,1346 r270 top locked
SH11 "LeaderTech 20S-CBS-2x0.5x0.2 - DIVIDE QUANITY REQURIED BY 10!" "SHIELD BASE" 3936,1846 r270 top locked
SH12 "LeaderTech 20S-CBS-2x0.5x0.2 - DIVIDE QUANITY REQURIED BY 10!" "SHIELD BASE" 3936,2346 r270 top locked
SH13 "LeaderTech 20S-CBS-2x0.5x0.2 - DIVIDE QUANITY REQURIED BY 10!" "SHIELD BASE CORNER" 3805,2727 r0 top locked
SH14 "LeaderTech 20S-CBS-2x0.5x0.2 - DIVIDE QUANITY REQURIED BY 10!" "SHIELD BASE" 3305,2727 r0 top locked
SH16 "LeaderTech 20S-CBS-2x0.5x0.2 - DIVIDE QUANITY REQURIED BY 10!" "SHIELD BASE" 2805,2727 r0 top locked
SH17 "LeaderTech 20S-CBS-2x0.5x0.2 - DIVIDE QUANITY REQURIED BY 10!" "SHIELD BASE" 2305,2727 r0 top locked
SH18 "LeaderTech 20S-CBS-2x0.5x0.2 - DIVIDE QUANITY REQURIED BY 10!" "SHIELD BASE" 1805,2727 r0 top locked
SH19 "LeaderTech 20S-CBS-2x0.5x0.2 - DIVIDE QUANITY REQURIED BY 10!" "SHIELD BASE" 1305,2727 r0 top locked
SH20 "LeaderTech 20S-CBS-2x0.5x0.2 - DIVIDE QUANITY REQURIED BY 10!" "SHIELD BASE CORNER" 924,2596 r90 top locked
SH21 "LeaderTech 20S-CBS-2x0.5x0.2 - DIVIDE QUANITY REQURIED BY 10!" "SHIELD BASE" 924,2096 r90 top locked
SH22 "LeaderTech 20S-CBS-2x0.5x0.2 - DIVIDE QUANITY REQURIED BY 10!" "SHIELD BASE" 924,1596 r90 top locked
SH23 "LeaderTech 20S-CBS-2x0.5x0.2 - DIVIDE QUANITY REQURIED BY 10!" "SHIELD BASE" 924,1096 r90 top locked
SH24 "LeaderTech 20S-CBS-2x0.5x0.2 - DIVIDE QUANITY REQURIED BY 10!" "SHIELD BASE" 924,596 r90 top locked
U1_1 "LT1498IS8#PBF-ND" SO8#1 3050,2445 r270 top (schematic designator U1)
U1_2 "LT1498IS8#PBF-ND" SO8#1 3052,1824 r270 top (schematic designator U1)
U1_3 "LT1498IS8#PBF-ND" SO8#1 3057,1215 r270 top (schematic designator U1)
U1_4 "LT1498IS8#PBF-ND" SO8#1 3057,624 r270 top (schematic designator U1)
U2_1 "LT6200-5" SOT23-6 1590,2440 r180 top (schematic designator U2)
U2_2 "LT6200-5" SOT23-6 1592,1819 r180 top (schematic designator U2)
U2_3 "LT6200-5" SOT23-6 1597,1210 r180 top (schematic designator U2)
U2_4 "LT6200-5" SOT23-6 1599,615 r180 top (schematic designator U2)
U3_1 "DAC8571IDGK" MSOP-8 3621.5,2172 r0 bottom (schematic designator U3)
U3_2 "DAC8571IDGK" MSOP-8 3621.5,1547 r0 bottom (schematic designator U3)
U3_3 "DAC8571IDGK" MSOP-8 3621.5,926 r0 bottom (schematic designator U3)
U3_4 "DAC8571IDGK" MSOP-8 3621.5,302 r0 bottom (schematic designator U3)
U4_1 "DAC8571IDGK" MSOP-8 3622.5,2587 r0 bottom (schematic designator U4)
U4_2 "DAC8571IDGK" MSOP-8 3622.5,1962 r0 bottom (schematic designator U4)
U4_3 "DAC8571IDGK" MSOP-8 3622.5,1341 r0 bottom (schematic designator U4)
U4_4 "DAC8571IDGK" MSOP-8 3622.5,717 r0 bottom (schematic designator U4)
U5_1 "THS4131ID" SO8#1 1942,2338 r90 top (schematic designator U5)
U5_2 "THS4131ID" SO8#1 1944,1717 r90 top (schematic designator U5)
U5_3 "THS4131ID" SO8#1 1949,1108 r90 top (schematic designator U5)
U5_4 "THS4131ID" SO8#1 1951,513 r90 top (schematic designator U5)
U6_1 "DAC8571IDGK" MSOP-8 3619.5,2379 r0 bottom (schematic designator U6)